# EAGLE board Qwiic_Mux_PCA9846-Panel (EAGLE 9.6.2), part 1 of 7
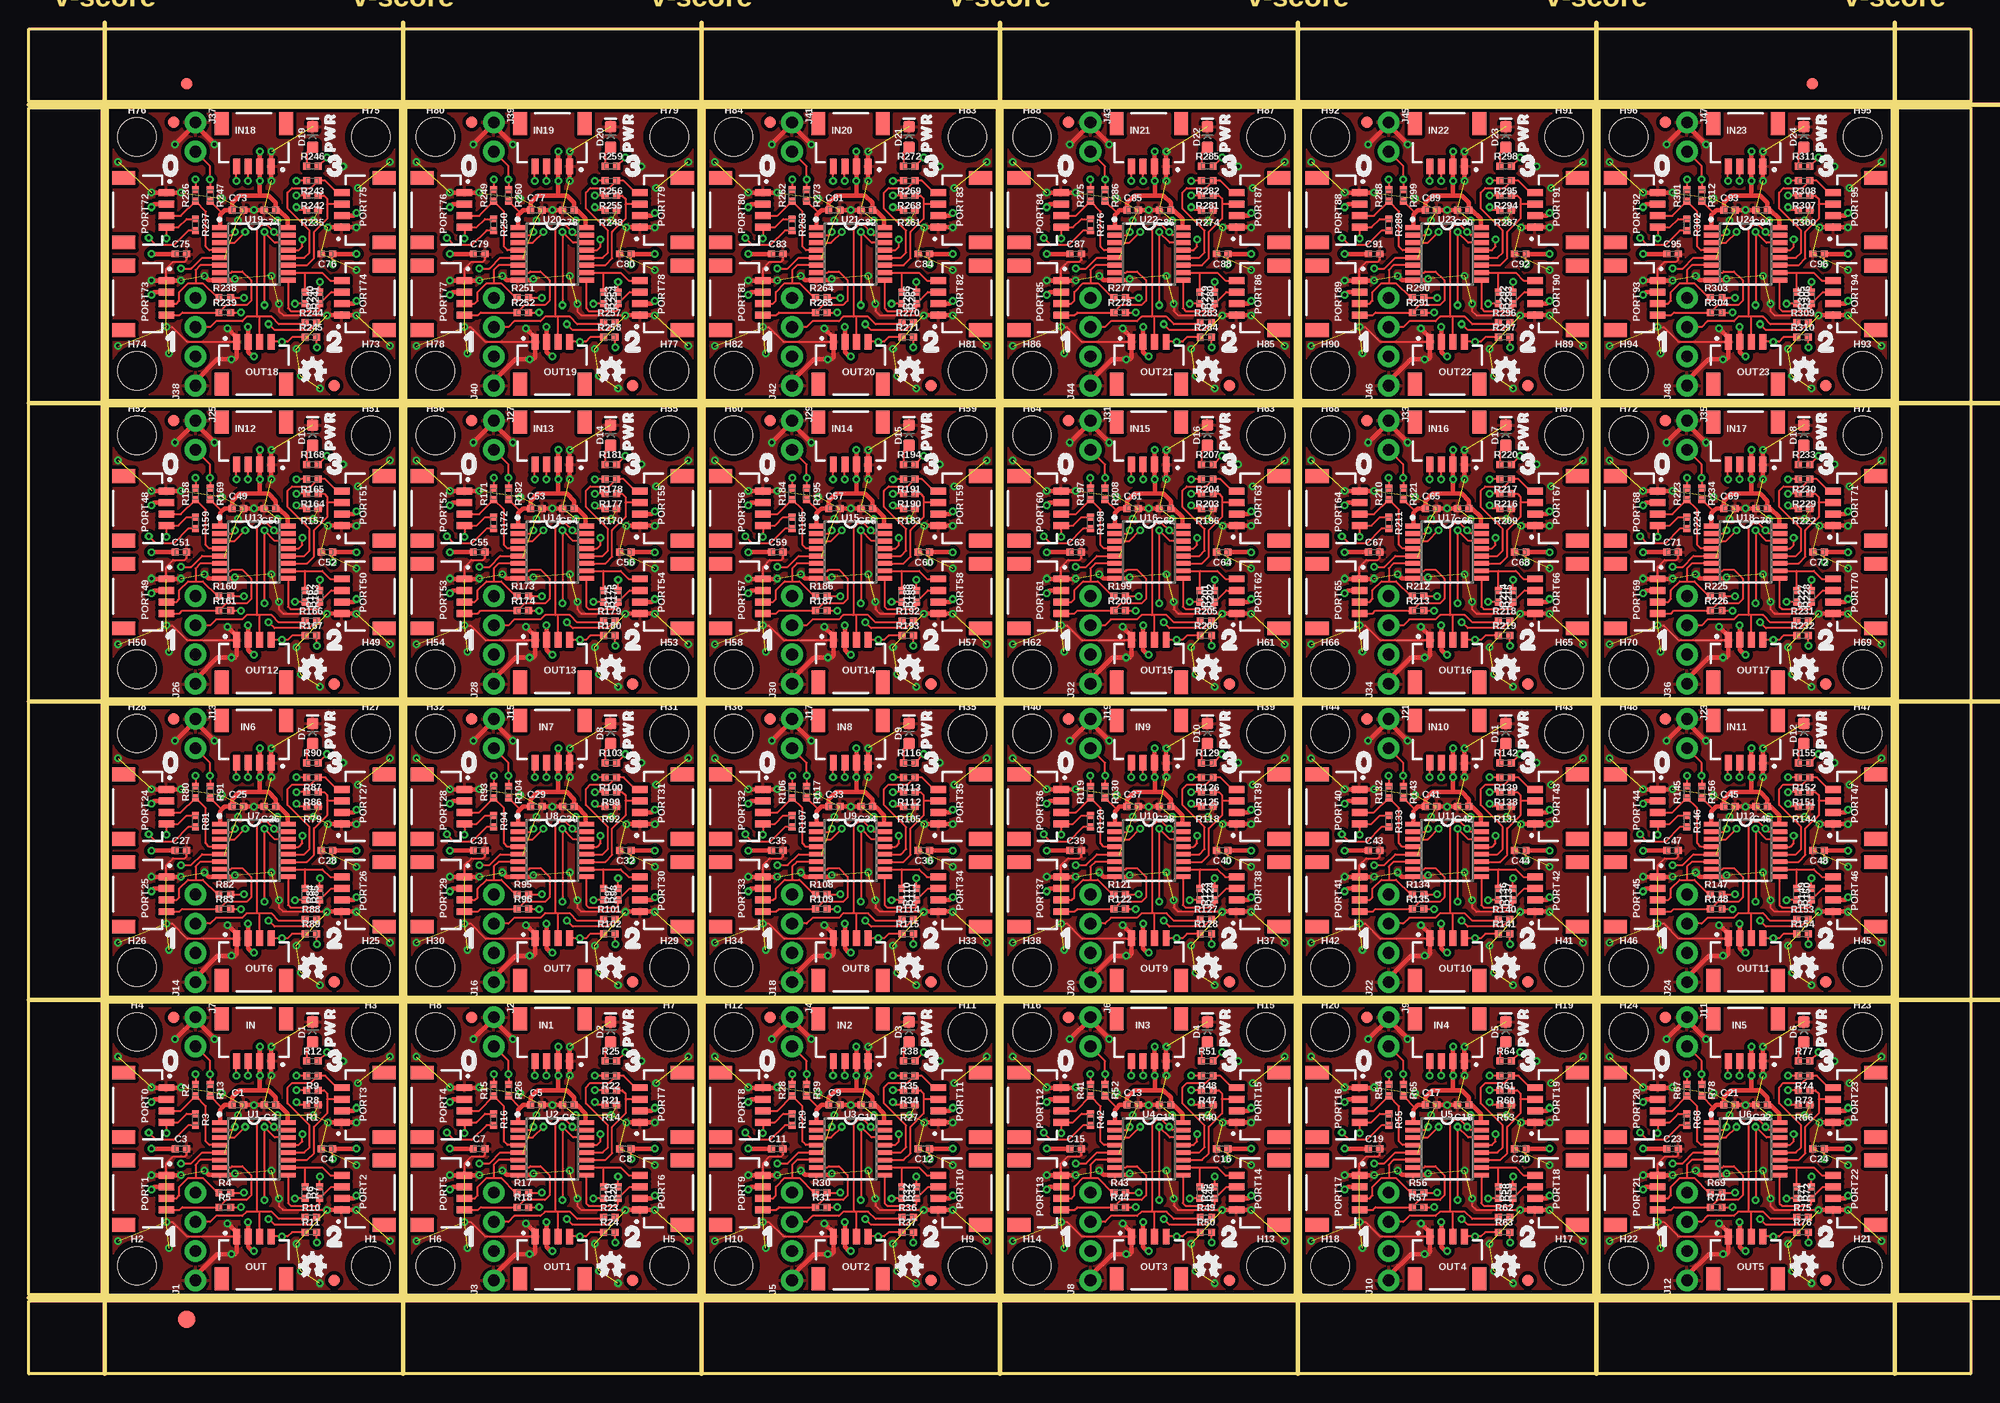
[diagram p0: board, top side]
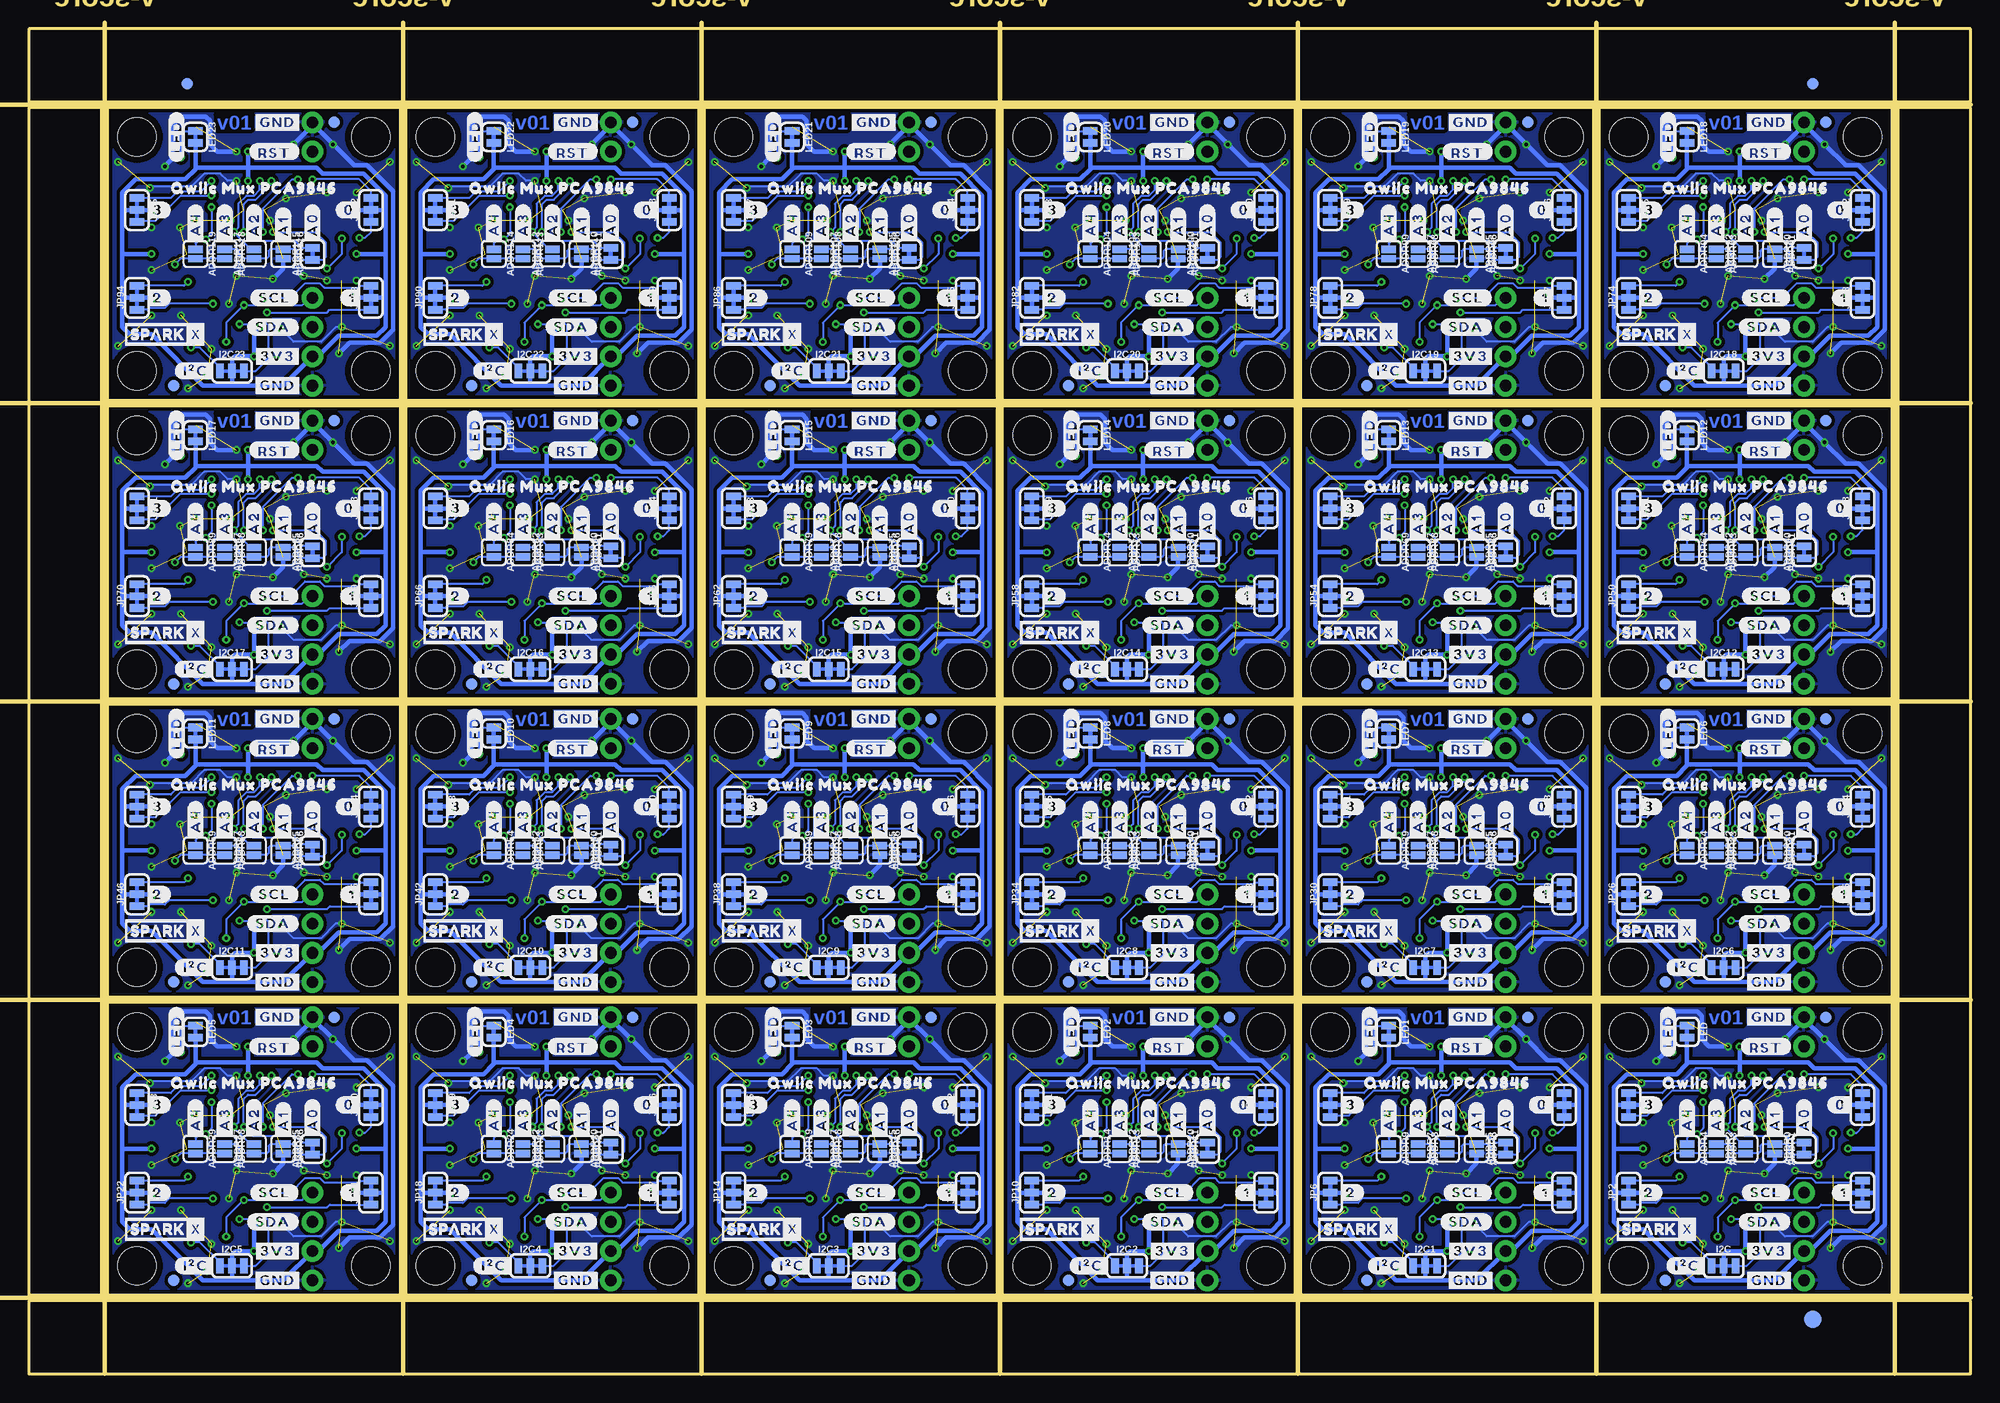
[diagram p1: board, bottom side, seen from below]

Size 168.66 x 116.84 mm. Coordinates in mm from the lower left corner, seen from the top.
Outline: 6.86,6.86 32.26,6.86 32.26,32.26 6.86,32.26 6.86,6.86
Outline: 32.77,6.86 58.17,6.86 58.17,32.26 32.77,32.26 32.77,6.86
Outline: 58.67,6.86 84.07,6.86 84.07,32.26 58.67,32.26 58.67,6.86
Outline: 84.58,6.86 109.98,6.86 109.98,32.26 84.58,32.26 84.58,6.86
Outline: 110.49,6.86 135.89,6.86 135.89,32.26 110.49,32.26 110.49,6.86
Outline: 136.4,6.86 161.8,6.86 161.8,32.26 136.4,32.26 136.4,6.86
Outline: 6.86,32.77 32.26,32.77 32.26,58.17 6.86,58.17 6.86,32.77
Outline: 32.77,32.77 58.17,32.77 58.17,58.17 32.77,58.17 32.77,32.77
Outline: 58.67,32.77 84.07,32.77 84.07,58.17 58.67,58.17 58.67,32.77
Outline: 84.58,32.77 109.98,32.77 109.98,58.17 84.58,58.17 84.58,32.77
Outline: 110.49,32.77 135.89,32.77 135.89,58.17 110.49,58.17 110.49,32.77
Outline: 136.4,32.77 161.8,32.77 161.8,58.17 136.4,58.17 136.4,32.77
Outline: 6.86,58.67 32.26,58.67 32.26,84.07 6.86,84.07 6.86,58.67
Outline: 32.77,58.67 58.17,58.67 58.17,84.07 32.77,84.07 32.77,58.67
Outline: 58.67,58.67 84.07,58.67 84.07,84.07 58.67,84.07 58.67,58.67
Outline: 84.58,58.67 109.98,58.67 109.98,84.07 84.58,84.07 84.58,58.67
Outline: 110.49,58.67 135.89,58.67 135.89,84.07 110.49,84.07 110.49,58.67
Outline: 136.4,58.67 161.8,58.67 161.8,84.07 136.4,84.07 136.4,58.67
Outline: 6.86,84.58 32.26,84.58 32.26,109.98 6.86,109.98 6.86,84.58
Outline: 32.77,84.58 58.17,84.58 58.17,109.98 32.77,109.98 32.77,84.58
Outline: 58.67,84.58 84.07,84.58 84.07,109.98 58.67,109.98 58.67,84.58
Outline: 84.58,84.58 109.98,84.58 109.98,109.98 84.58,109.98 84.58,84.58
Outline: 110.49,84.58 135.89,84.58 135.89,109.98 110.49,109.98 110.49,84.58
Outline: 136.4,84.58 161.8,84.58 161.8,109.98 136.4,109.98 136.4,84.58
Outline: 0,6.35 168.66,6.35 168.66,0 0,0 0,6.35
Outline: 162.31,109.98 168.66,109.98 168.66,6.86 162.31,6.86 162.31,109.98
Outline: 0,116.84 168.66,116.84 168.66,110.49 0,110.49 0,116.84
Outline: 0,109.98 6.35,109.98 6.35,6.86 0,6.86 0,109.98
Copper layers (1*16): Top 0.035mm / dielectric 1.5mm / Bottom 0.035mm
Design rules "Qwiic_Mux_PCA9846": minimum track width 7mil, minimum drill 0.3mm, track to track 7mil, track to pad 7mil, pad to pad 7mil, via to via 7mil, smd to smd 7mil, copper to edge 7mil, drill to drill 7mil, minimum pad ring 7mil, minimum via ring 7mil, stop-mask expansion 3mil, vias tented up to drill 25mil, thermal gap 10mil
Milling: 12 lines

## Footprints (pad centres in the part's own frame; a part is rotated, then mirrored left to right if it is on the bottom)
SMT-JUMPER_2_NC_TRACE_SILK = smd 0.66 x 1.27: 1 -0.521,0; 2 0.521,0
SMT-JUMPER_2_NO_SILK = smd 0.635 x 1.27: 1 -0.406,0; 2 0.406,0
0402-TIGHT = smd 0.6 x 0.6: 1 -0.5,0; 2 0.5,0
LED-0603 = smd 1 x 1: A -0.877,0; C 0.877,0
FIDUCIAL-1X2 = smd 1 x 1: 1 0,0
FIDUCIAL-1.5X3 = smd 1.5 x 1.5: 1 0,0
STAND-OFF = hole 3.302: 0,0
SMT-JUMPER_3_2-NC_TRACE_SILK = smd 0.66 x 1.27: 1 -1.041,0; 2 0,0; 3 1.041,0
JST04_1MM_RA = smd 0.6 x 1.35: 1 -1.5,0; 2 -0.5,0; 3 0.5,0; 4 1.5,0 | smd 1.2 x 2: NC1 2.8,-3.675; NC2 -2.8,-3.675
1X04_NO_SILK = drill 1.016 pad 1.88: 1 0,0; 2 2.54,0; 3 5.08,0; 4 7.62,0
1X02_NO_SILK = drill 1.016 pad 1.88: 1 0,0; 2 2.54,0
SOT403-1 = smd 0.4 x 1.4: 1 -2.275,-2.95; 2 -1.625,-2.95; 3 -0.975,-2.95; 4 -0.325,-2.95; 5 0.325,-2.95; 6 0.975,-2.95; 7 1.625,-2.95; 8 2.275,-2.95; 9 2.275,2.95; 10 1.625,2.95; 11 0.975,2.95; 12 0.325,2.95; 13 -0.325,2.95; 14 -0.975,2.95; 15 -1.625,2.95; 16 -2.275,2.95

## Placement (x,y rotation side)
ADDR0  JUMPER-SMT_2_NC_TRACE_SILK  [SMT-JUMPER_2_NC_TRACE_SILK]  14.48,19.56 90 bottom
ADDR1  JUMPER-SMT_2_NO_SILK  [SMT-JUMPER_2_NO_SILK]  17.02,19.56 270 bottom
ADDR2  JUMPER-SMT_2_NO_SILK  [SMT-JUMPER_2_NO_SILK]  19.56,19.56 90 bottom
ADDR3  JUMPER-SMT_2_NO_SILK  [SMT-JUMPER_2_NO_SILK]  22.1,19.56 270 bottom
ADDR4  JUMPER-SMT_2_NO_SILK  [SMT-JUMPER_2_NO_SILK]  24.64,19.56 270 bottom
ADDR5  JUMPER-SMT_2_NC_TRACE_SILK  [SMT-JUMPER_2_NC_TRACE_SILK]  40.39,19.56 90 bottom
ADDR6  JUMPER-SMT_2_NO_SILK  [SMT-JUMPER_2_NO_SILK]  42.93,19.56 270 bottom
ADDR7  JUMPER-SMT_2_NO_SILK  [SMT-JUMPER_2_NO_SILK]  45.47,19.56 90 bottom
ADDR8  JUMPER-SMT_2_NO_SILK  [SMT-JUMPER_2_NO_SILK]  48.01,19.56 270 bottom
ADDR9  JUMPER-SMT_2_NO_SILK  [SMT-JUMPER_2_NO_SILK]  50.55,19.56 270 bottom
ADDR10  JUMPER-SMT_2_NC_TRACE_SILK  [SMT-JUMPER_2_NC_TRACE_SILK]  66.29,19.56 90 bottom
ADDR11  JUMPER-SMT_2_NO_SILK  [SMT-JUMPER_2_NO_SILK]  68.83,19.56 270 bottom
ADDR12  JUMPER-SMT_2_NO_SILK  [SMT-JUMPER_2_NO_SILK]  71.37,19.56 90 bottom
ADDR13  JUMPER-SMT_2_NO_SILK  [SMT-JUMPER_2_NO_SILK]  73.91,19.56 270 bottom
ADDR14  JUMPER-SMT_2_NO_SILK  [SMT-JUMPER_2_NO_SILK]  76.45,19.56 270 bottom
ADDR15  JUMPER-SMT_2_NC_TRACE_SILK  [SMT-JUMPER_2_NC_TRACE_SILK]  92.2,19.56 90 bottom
ADDR16  JUMPER-SMT_2_NO_SILK  [SMT-JUMPER_2_NO_SILK]  94.74,19.56 270 bottom
ADDR17  JUMPER-SMT_2_NO_SILK  [SMT-JUMPER_2_NO_SILK]  97.28,19.56 90 bottom
ADDR18  JUMPER-SMT_2_NO_SILK  [SMT-JUMPER_2_NO_SILK]  99.82,19.56 270 bottom
ADDR19  JUMPER-SMT_2_NO_SILK  [SMT-JUMPER_2_NO_SILK]  102.36,19.56 270 bottom
ADDR20  JUMPER-SMT_2_NC_TRACE_SILK  [SMT-JUMPER_2_NC_TRACE_SILK]  118.11,19.56 90 bottom
ADDR21  JUMPER-SMT_2_NO_SILK  [SMT-JUMPER_2_NO_SILK]  120.65,19.56 270 bottom
ADDR22  JUMPER-SMT_2_NO_SILK  [SMT-JUMPER_2_NO_SILK]  123.19,19.56 90 bottom
ADDR23  JUMPER-SMT_2_NO_SILK  [SMT-JUMPER_2_NO_SILK]  125.73,19.56 270 bottom
ADDR24  JUMPER-SMT_2_NO_SILK  [SMT-JUMPER_2_NO_SILK]  128.27,19.56 270 bottom
ADDR25  JUMPER-SMT_2_NC_TRACE_SILK  [SMT-JUMPER_2_NC_TRACE_SILK]  144.02,19.56 90 bottom
ADDR26  JUMPER-SMT_2_NO_SILK  [SMT-JUMPER_2_NO_SILK]  146.56,19.56 270 bottom
ADDR27  JUMPER-SMT_2_NO_SILK  [SMT-JUMPER_2_NO_SILK]  149.1,19.56 90 bottom
ADDR28  JUMPER-SMT_2_NO_SILK  [SMT-JUMPER_2_NO_SILK]  151.64,19.56 270 bottom
ADDR29  JUMPER-SMT_2_NO_SILK  [SMT-JUMPER_2_NO_SILK]  154.18,19.56 270 bottom
ADDR30  JUMPER-SMT_2_NC_TRACE_SILK  [SMT-JUMPER_2_NC_TRACE_SILK]  14.48,45.47 90 bottom
ADDR31  JUMPER-SMT_2_NO_SILK  [SMT-JUMPER_2_NO_SILK]  17.02,45.47 270 bottom
ADDR32  JUMPER-SMT_2_NO_SILK  [SMT-JUMPER_2_NO_SILK]  19.56,45.47 90 bottom
ADDR33  JUMPER-SMT_2_NO_SILK  [SMT-JUMPER_2_NO_SILK]  22.1,45.47 270 bottom
ADDR34  JUMPER-SMT_2_NO_SILK  [SMT-JUMPER_2_NO_SILK]  24.64,45.47 270 bottom
ADDR35  JUMPER-SMT_2_NC_TRACE_SILK  [SMT-JUMPER_2_NC_TRACE_SILK]  40.39,45.47 90 bottom
ADDR36  JUMPER-SMT_2_NO_SILK  [SMT-JUMPER_2_NO_SILK]  42.93,45.47 270 bottom
ADDR37  JUMPER-SMT_2_NO_SILK  [SMT-JUMPER_2_NO_SILK]  45.47,45.47 90 bottom
ADDR38  JUMPER-SMT_2_NO_SILK  [SMT-JUMPER_2_NO_SILK]  48.01,45.47 270 bottom
ADDR39  JUMPER-SMT_2_NO_SILK  [SMT-JUMPER_2_NO_SILK]  50.55,45.47 270 bottom
ADDR40  JUMPER-SMT_2_NC_TRACE_SILK  [SMT-JUMPER_2_NC_TRACE_SILK]  66.29,45.47 90 bottom
ADDR41  JUMPER-SMT_2_NO_SILK  [SMT-JUMPER_2_NO_SILK]  68.83,45.47 270 bottom
ADDR42  JUMPER-SMT_2_NO_SILK  [SMT-JUMPER_2_NO_SILK]  71.37,45.47 90 bottom
ADDR43  JUMPER-SMT_2_NO_SILK  [SMT-JUMPER_2_NO_SILK]  73.91,45.47 270 bottom
ADDR44  JUMPER-SMT_2_NO_SILK  [SMT-JUMPER_2_NO_SILK]  76.45,45.47 270 bottom
ADDR45  JUMPER-SMT_2_NC_TRACE_SILK  [SMT-JUMPER_2_NC_TRACE_SILK]  92.2,45.47 90 bottom
ADDR46  JUMPER-SMT_2_NO_SILK  [SMT-JUMPER_2_NO_SILK]  94.74,45.47 270 bottom
ADDR47  JUMPER-SMT_2_NO_SILK  [SMT-JUMPER_2_NO_SILK]  97.28,45.47 90 bottom
ADDR48  JUMPER-SMT_2_NO_SILK  [SMT-JUMPER_2_NO_SILK]  99.82,45.47 270 bottom
ADDR49  JUMPER-SMT_2_NO_SILK  [SMT-JUMPER_2_NO_SILK]  102.36,45.47 270 bottom
ADDR50  JUMPER-SMT_2_NC_TRACE_SILK  [SMT-JUMPER_2_NC_TRACE_SILK]  118.11,45.47 90 bottom
ADDR51  JUMPER-SMT_2_NO_SILK  [SMT-JUMPER_2_NO_SILK]  120.65,45.47 270 bottom
ADDR52  JUMPER-SMT_2_NO_SILK  [SMT-JUMPER_2_NO_SILK]  123.19,45.47 90 bottom
ADDR53  JUMPER-SMT_2_NO_SILK  [SMT-JUMPER_2_NO_SILK]  125.73,45.47 270 bottom
ADDR54  JUMPER-SMT_2_NO_SILK  [SMT-JUMPER_2_NO_SILK]  128.27,45.47 270 bottom
ADDR55  JUMPER-SMT_2_NC_TRACE_SILK  [SMT-JUMPER_2_NC_TRACE_SILK]  144.02,45.47 90 bottom
ADDR56  JUMPER-SMT_2_NO_SILK  [SMT-JUMPER_2_NO_SILK]  146.56,45.47 270 bottom
ADDR57  JUMPER-SMT_2_NO_SILK  [SMT-JUMPER_2_NO_SILK]  149.1,45.47 90 bottom
ADDR58  JUMPER-SMT_2_NO_SILK  [SMT-JUMPER_2_NO_SILK]  151.64,45.47 270 bottom
ADDR59  JUMPER-SMT_2_NO_SILK  [SMT-JUMPER_2_NO_SILK]  154.18,45.47 270 bottom
ADDR60  JUMPER-SMT_2_NC_TRACE_SILK  [SMT-JUMPER_2_NC_TRACE_SILK]  14.48,71.37 90 bottom
ADDR61  JUMPER-SMT_2_NO_SILK  [SMT-JUMPER_2_NO_SILK]  17.02,71.37 270 bottom
ADDR62  JUMPER-SMT_2_NO_SILK  [SMT-JUMPER_2_NO_SILK]  19.56,71.37 90 bottom
ADDR63  JUMPER-SMT_2_NO_SILK  [SMT-JUMPER_2_NO_SILK]  22.1,71.37 270 bottom
ADDR64  JUMPER-SMT_2_NO_SILK  [SMT-JUMPER_2_NO_SILK]  24.64,71.37 270 bottom
ADDR65  JUMPER-SMT_2_NC_TRACE_SILK  [SMT-JUMPER_2_NC_TRACE_SILK]  40.39,71.37 90 bottom
ADDR66  JUMPER-SMT_2_NO_SILK  [SMT-JUMPER_2_NO_SILK]  42.93,71.37 270 bottom
ADDR67  JUMPER-SMT_2_NO_SILK  [SMT-JUMPER_2_NO_SILK]  45.47,71.37 90 bottom
ADDR68  JUMPER-SMT_2_NO_SILK  [SMT-JUMPER_2_NO_SILK]  48.01,71.37 270 bottom
ADDR69  JUMPER-SMT_2_NO_SILK  [SMT-JUMPER_2_NO_SILK]  50.55,71.37 270 bottom
ADDR70  JUMPER-SMT_2_NC_TRACE_SILK  [SMT-JUMPER_2_NC_TRACE_SILK]  66.29,71.37 90 bottom
ADDR71  JUMPER-SMT_2_NO_SILK  [SMT-JUMPER_2_NO_SILK]  68.83,71.37 270 bottom
ADDR72  JUMPER-SMT_2_NO_SILK  [SMT-JUMPER_2_NO_SILK]  71.37,71.37 90 bottom
ADDR73  JUMPER-SMT_2_NO_SILK  [SMT-JUMPER_2_NO_SILK]  73.91,71.37 270 bottom
ADDR74  JUMPER-SMT_2_NO_SILK  [SMT-JUMPER_2_NO_SILK]  76.45,71.37 270 bottom
ADDR75  JUMPER-SMT_2_NC_TRACE_SILK  [SMT-JUMPER_2_NC_TRACE_SILK]  92.2,71.37 90 bottom
ADDR76  JUMPER-SMT_2_NO_SILK  [SMT-JUMPER_2_NO_SILK]  94.74,71.37 270 bottom
ADDR77  JUMPER-SMT_2_NO_SILK  [SMT-JUMPER_2_NO_SILK]  97.28,71.37 90 bottom
ADDR78  JUMPER-SMT_2_NO_SILK  [SMT-JUMPER_2_NO_SILK]  99.82,71.37 270 bottom
ADDR79  JUMPER-SMT_2_NO_SILK  [SMT-JUMPER_2_NO_SILK]  102.36,71.37 270 bottom
ADDR80  JUMPER-SMT_2_NC_TRACE_SILK  [SMT-JUMPER_2_NC_TRACE_SILK]  118.11,71.37 90 bottom
ADDR81  JUMPER-SMT_2_NO_SILK  [SMT-JUMPER_2_NO_SILK]  120.65,71.37 270 bottom
ADDR82  JUMPER-SMT_2_NO_SILK  [SMT-JUMPER_2_NO_SILK]  123.19,71.37 90 bottom
ADDR83  JUMPER-SMT_2_NO_SILK  [SMT-JUMPER_2_NO_SILK]  125.73,71.37 270 bottom
ADDR84  JUMPER-SMT_2_NO_SILK  [SMT-JUMPER_2_NO_SILK]  128.27,71.37 270 bottom
ADDR85  JUMPER-SMT_2_NC_TRACE_SILK  [SMT-JUMPER_2_NC_TRACE_SILK]  144.02,71.37 90 bottom
ADDR86  JUMPER-SMT_2_NO_SILK  [SMT-JUMPER_2_NO_SILK]  146.56,71.37 270 bottom
ADDR87  JUMPER-SMT_2_NO_SILK  [SMT-JUMPER_2_NO_SILK]  149.1,71.37 90 bottom
ADDR88  JUMPER-SMT_2_NO_SILK  [SMT-JUMPER_2_NO_SILK]  151.64,71.37 270 bottom
ADDR89  JUMPER-SMT_2_NO_SILK  [SMT-JUMPER_2_NO_SILK]  154.18,71.37 270 bottom
ADDR90  JUMPER-SMT_2_NC_TRACE_SILK  [SMT-JUMPER_2_NC_TRACE_SILK]  14.48,97.28 90 bottom
ADDR91  JUMPER-SMT_2_NO_SILK  [SMT-JUMPER_2_NO_SILK]  17.02,97.28 270 bottom
ADDR92  JUMPER-SMT_2_NO_SILK  [SMT-JUMPER_2_NO_SILK]  19.56,97.28 90 bottom
ADDR93  JUMPER-SMT_2_NO_SILK  [SMT-JUMPER_2_NO_SILK]  22.1,97.28 270 bottom
ADDR94  JUMPER-SMT_2_NO_SILK  [SMT-JUMPER_2_NO_SILK]  24.64,97.28 270 bottom
ADDR95  JUMPER-SMT_2_NC_TRACE_SILK  [SMT-JUMPER_2_NC_TRACE_SILK]  40.39,97.28 90 bottom
ADDR96  JUMPER-SMT_2_NO_SILK  [SMT-JUMPER_2_NO_SILK]  42.93,97.28 270 bottom
ADDR97  JUMPER-SMT_2_NO_SILK  [SMT-JUMPER_2_NO_SILK]  45.47,97.28 90 bottom
ADDR98  JUMPER-SMT_2_NO_SILK  [SMT-JUMPER_2_NO_SILK]  48.01,97.28 270 bottom
ADDR99  JUMPER-SMT_2_NO_SILK  [SMT-JUMPER_2_NO_SILK]  50.55,97.28 270 bottom
ADDR100  JUMPER-SMT_2_NC_TRACE_SILK  [SMT-JUMPER_2_NC_TRACE_SILK]  66.29,97.28 90 bottom
ADDR101  JUMPER-SMT_2_NO_SILK  [SMT-JUMPER_2_NO_SILK]  68.83,97.28 270 bottom
ADDR102  JUMPER-SMT_2_NO_SILK  [SMT-JUMPER_2_NO_SILK]  71.37,97.28 90 bottom
ADDR103  JUMPER-SMT_2_NO_SILK  [SMT-JUMPER_2_NO_SILK]  73.91,97.28 270 bottom
ADDR104  JUMPER-SMT_2_NO_SILK  [SMT-JUMPER_2_NO_SILK]  76.45,97.28 270 bottom
ADDR105  JUMPER-SMT_2_NC_TRACE_SILK  [SMT-JUMPER_2_NC_TRACE_SILK]  92.2,97.28 90 bottom
ADDR106  JUMPER-SMT_2_NO_SILK  [SMT-JUMPER_2_NO_SILK]  94.74,97.28 270 bottom
ADDR107  JUMPER-SMT_2_NO_SILK  [SMT-JUMPER_2_NO_SILK]  97.28,97.28 90 bottom
ADDR108  JUMPER-SMT_2_NO_SILK  [SMT-JUMPER_2_NO_SILK]  99.82,97.28 270 bottom
ADDR109  JUMPER-SMT_2_NO_SILK  [SMT-JUMPER_2_NO_SILK]  102.36,97.28 270 bottom
ADDR110  JUMPER-SMT_2_NC_TRACE_SILK  [SMT-JUMPER_2_NC_TRACE_SILK]  118.11,97.28 90 bottom
ADDR111  JUMPER-SMT_2_NO_SILK  [SMT-JUMPER_2_NO_SILK]  120.65,97.28 270 bottom
ADDR112  JUMPER-SMT_2_NO_SILK  [SMT-JUMPER_2_NO_SILK]  123.19,97.28 90 bottom
ADDR113  JUMPER-SMT_2_NO_SILK  [SMT-JUMPER_2_NO_SILK]  125.73,97.28 270 bottom
ADDR114  JUMPER-SMT_2_NO_SILK  [SMT-JUMPER_2_NO_SILK]  128.27,97.28 270 bottom
ADDR115  JUMPER-SMT_2_NC_TRACE_SILK  [SMT-JUMPER_2_NC_TRACE_SILK]  144.02,97.28 90 bottom
ADDR116  JUMPER-SMT_2_NO_SILK  [SMT-JUMPER_2_NO_SILK]  146.56,97.28 270 bottom
ADDR117  JUMPER-SMT_2_NO_SILK  [SMT-JUMPER_2_NO_SILK]  149.1,97.28 90 bottom
ADDR118  JUMPER-SMT_2_NO_SILK  [SMT-JUMPER_2_NO_SILK]  151.64,97.28 270 bottom
ADDR119  JUMPER-SMT_2_NO_SILK  [SMT-JUMPER_2_NO_SILK]  154.18,97.28 270 bottom
C1  2.2uF  [0402-TIGHT]  18.16,23.37 0 top
C2  0.1uF  [0402-TIGHT]  20.95,23.37 180 top
C3  2.2uF  [0402-TIGHT]  13.21,19.56 0 top
C4  2.2uF  [0402-TIGHT]  25.91,19.56 180 top
C5  2.2uF  [0402-TIGHT]  44.07,23.37 0 top
C6  0.1uF  [0402-TIGHT]  46.86,23.37 180 top
C7  2.2uF  [0402-TIGHT]  39.12,19.56 0 top
C8  2.2uF  [0402-TIGHT]  51.82,19.56 180 top
C9  2.2uF  [0402-TIGHT]  69.98,23.37 0 top
C10  0.1uF  [0402-TIGHT]  72.77,23.37 180 top
C11  2.2uF  [0402-TIGHT]  65.02,19.56 0 top
C12  2.2uF  [0402-TIGHT]  77.72,19.56 180 top
C13  2.2uF  [0402-TIGHT]  95.89,23.37 0 top
C14  0.1uF  [0402-TIGHT]  98.68,23.37 180 top
C15  2.2uF  [0402-TIGHT]  90.93,19.56 0 top
C16  2.2uF  [0402-TIGHT]  103.63,19.56 180 top
C17  2.2uF  [0402-TIGHT]  121.79,23.37 0 top
C18  0.1uF  [0402-TIGHT]  124.59,23.37 180 top
C19  2.2uF  [0402-TIGHT]  116.84,19.56 0 top
C20  2.2uF  [0402-TIGHT]  129.54,19.56 180 top
C21  2.2uF  [0402-TIGHT]  147.7,23.37 0 top
C22  0.1uF  [0402-TIGHT]  150.5,23.37 180 top
C23  2.2uF  [0402-TIGHT]  142.75,19.56 0 top
C24  2.2uF  [0402-TIGHT]  155.45,19.56 180 top
C25  2.2uF  [0402-TIGHT]  18.16,49.28 0 top
C26  0.1uF  [0402-TIGHT]  20.95,49.28 180 top
C27  2.2uF  [0402-TIGHT]  13.21,45.47 0 top
C28  2.2uF  [0402-TIGHT]  25.91,45.47 180 top
C29  2.2uF  [0402-TIGHT]  44.07,49.28 0 top
C30  0.1uF  [0402-TIGHT]  46.86,49.28 180 top
C31  2.2uF  [0402-TIGHT]  39.12,45.47 0 top
C32  2.2uF  [0402-TIGHT]  51.82,45.47 180 top
C33  2.2uF  [0402-TIGHT]  69.98,49.28 0 top
C34  0.1uF  [0402-TIGHT]  72.77,49.28 180 top
C35  2.2uF  [0402-TIGHT]  65.02,45.47 0 top
C36  2.2uF  [0402-TIGHT]  77.72,45.47 180 top
C37  2.2uF  [0402-TIGHT]  95.89,49.28 0 top
C38  0.1uF  [0402-TIGHT]  98.68,49.28 180 top
C39  2.2uF  [0402-TIGHT]  90.93,45.47 0 top
C40  2.2uF  [0402-TIGHT]  103.63,45.47 180 top
C41  2.2uF  [0402-TIGHT]  121.79,49.28 0 top
C42  0.1uF  [0402-TIGHT]  124.59,49.28 180 top
C43  2.2uF  [0402-TIGHT]  116.84,45.47 0 top
C44  2.2uF  [0402-TIGHT]  129.54,45.47 180 top
C45  2.2uF  [0402-TIGHT]  147.7,49.28 0 top
C46  0.1uF  [0402-TIGHT]  150.5,49.28 180 top
C47  2.2uF  [0402-TIGHT]  142.75,45.47 0 top
C48  2.2uF  [0402-TIGHT]  155.45,45.47 180 top
C49  2.2uF  [0402-TIGHT]  18.16,75.18 0 top
C50  0.1uF  [0402-TIGHT]  20.95,75.18 180 top
C51  2.2uF  [0402-TIGHT]  13.21,71.37 0 top
C52  2.2uF  [0402-TIGHT]  25.91,71.37 180 top
C53  2.2uF  [0402-TIGHT]  44.07,75.18 0 top
C54  0.1uF  [0402-TIGHT]  46.86,75.18 180 top
C55  2.2uF  [0402-TIGHT]  39.12,71.37 0 top
C56  2.2uF  [0402-TIGHT]  51.82,71.37 180 top
C57  2.2uF  [0402-TIGHT]  69.98,75.18 0 top
C58  0.1uF  [0402-TIGHT]  72.77,75.18 180 top
C59  2.2uF  [0402-TIGHT]  65.02,71.37 0 top
C60  2.2uF  [0402-TIGHT]  77.72,71.37 180 top
C61  2.2uF  [0402-TIGHT]  95.89,75.18 0 top
C62  0.1uF  [0402-TIGHT]  98.68,75.18 180 top
C63  2.2uF  [0402-TIGHT]  90.93,71.37 0 top
C64  2.2uF  [0402-TIGHT]  103.63,71.37 180 top
C65  2.2uF  [0402-TIGHT]  121.79,75.18 0 top
C66  0.1uF  [0402-TIGHT]  124.59,75.18 180 top
C67  2.2uF  [0402-TIGHT]  116.84,71.37 0 top
C68  2.2uF  [0402-TIGHT]  129.54,71.37 180 top
C69  2.2uF  [0402-TIGHT]  147.7,75.18 0 top
C70  0.1uF  [0402-TIGHT]  150.5,75.18 180 top
C71  2.2uF  [0402-TIGHT]  142.75,71.37 0 top
C72  2.2uF  [0402-TIGHT]  155.45,71.37 180 top
C73  2.2uF  [0402-TIGHT]  18.16,101.09 0 top
C74  0.1uF  [0402-TIGHT]  20.95,101.09 180 top
C75  2.2uF  [0402-TIGHT]  13.21,97.28 0 top
C76  2.2uF  [0402-TIGHT]  25.91,97.28 180 top
C77  2.2uF  [0402-TIGHT]  44.07,101.09 0 top
C78  0.1uF  [0402-TIGHT]  46.86,101.09 180 top
C79  2.2uF  [0402-TIGHT]  39.12,97.28 0 top
C80  2.2uF  [0402-TIGHT]  51.82,97.28 180 top
C81  2.2uF  [0402-TIGHT]  69.98,101.09 0 top
C82  0.1uF  [0402-TIGHT]  72.77,101.09 180 top
C83  2.2uF  [0402-TIGHT]  65.02,97.28 0 top
C84  2.2uF  [0402-TIGHT]  77.72,97.28 180 top
C85  2.2uF  [0402-TIGHT]  95.89,101.09 0 top
C86  0.1uF  [0402-TIGHT]  98.68,101.09 180 top
C87  2.2uF  [0402-TIGHT]  90.93,97.28 0 top
C88  2.2uF  [0402-TIGHT]  103.63,97.28 180 top
C89  2.2uF  [0402-TIGHT]  121.79,101.09 0 top
C90  0.1uF  [0402-TIGHT]  124.59,101.09 180 top
C91  2.2uF  [0402-TIGHT]  116.84,97.28 0 top
C92  2.2uF  [0402-TIGHT]  129.54,97.28 180 top
C93  2.2uF  [0402-TIGHT]  147.7,101.09 0 top
C94  0.1uF  [0402-TIGHT]  150.5,101.09 180 top
C95  2.2uF  [0402-TIGHT]  142.75,97.28 0 top
C96  2.2uF  [0402-TIGHT]  155.45,97.28 180 top
D1  RED  [LED-0603]  24.64,29.72 90 top
D2  RED  [LED-0603]  50.55,29.72 90 top
D3  RED  [LED-0603]  76.45,29.72 90 top
D4  RED  [LED-0603]  102.36,29.72 90 top
D5  RED  [LED-0603]  128.27,29.72 90 top
D6  RED  [LED-0603]  154.18,29.72 90 top
D7  RED  [LED-0603]  24.64,55.63 90 top
D8  RED  [LED-0603]  50.55,55.63 90 top
D9  RED  [LED-0603]  76.45,55.63 90 top
D10  RED  [LED-0603]  102.36,55.63 90 top
D11  RED  [LED-0603]  128.27,55.63 90 top
D12  RED  [LED-0603]  154.18,55.63 90 top
D13  RED  [LED-0603]  24.64,81.53 90 top
D14  RED  [LED-0603]  50.55,81.53 90 top
D15  RED  [LED-0603]  76.45,81.53 90 top
D16  RED  [LED-0603]  102.36,81.53 90 top
D17  RED  [LED-0603]  128.27,81.53 90 top
D18  RED  [LED-0603]  154.18,81.53 90 top
D19  RED  [LED-0603]  24.64,107.44 90 top
D20  RED  [LED-0603]  50.55,107.44 90 top
D21  RED  [LED-0603]  76.45,107.44 90 top
D22  RED  [LED-0603]  102.36,107.44 90 top
D23  RED  [LED-0603]  128.27,107.44 90 top
D24  RED  [LED-0603]  154.18,107.44 90 top
E$1  [FIDUCIAL-1X2]  13.72,112.08 0 top
E$2  [FIDUCIAL-1X2]  13.72,112.08 0 bottom
E$3  [FIDUCIAL-1X2]  154.88,112.08 0 top
E$4  [FIDUCIAL-1X2]  154.88,112.08 0 bottom
E$5  [FIDUCIAL-1.5X3]  13.72,4.76 0 top
E$6  [FIDUCIAL-1.5X3]  13.72,4.76 0 bottom
FD1  FIDUCIAL1X2  [FIDUCIAL-1X2]  12.57,30.99 0 top
FD2  FIDUCIAL1X2  [FIDUCIAL-1X2]  26.54,8.13 0 top
FD3  FIDUCIAL1X2  [FIDUCIAL-1X2]  12.57,30.99 0 bottom
FD4  FIDUCIAL1X2  [FIDUCIAL-1X2]  26.54,8.13 0 bottom
FD5  FIDUCIAL1X2  [FIDUCIAL-1X2]  38.48,30.99 0 top
FD6  FIDUCIAL1X2  [FIDUCIAL-1X2]  52.45,8.13 0 top
FD7  FIDUCIAL1X2  [FIDUCIAL-1X2]  38.48,30.99 0 bottom
FD8  FIDUCIAL1X2  [FIDUCIAL-1X2]  52.45,8.13 0 bottom
FD9  FIDUCIAL1X2  [FIDUCIAL-1X2]  64.39,30.99 0 top
FD10  FIDUCIAL1X2  [FIDUCIAL-1X2]  78.36,8.13 0 top
FD11  FIDUCIAL1X2  [FIDUCIAL-1X2]  64.39,30.99 0 bottom
FD12  FIDUCIAL1X2  [FIDUCIAL-1X2]  78.36,8.13 0 bottom
FD13  FIDUCIAL1X2  [FIDUCIAL-1X2]  90.3,30.99 0 top
FD14  FIDUCIAL1X2  [FIDUCIAL-1X2]  104.27,8.13 0 top
FD15  FIDUCIAL1X2  [FIDUCIAL-1X2]  90.3,30.99 0 bottom
FD16  FIDUCIAL1X2  [FIDUCIAL-1X2]  104.27,8.13 0 bottom
FD17  FIDUCIAL1X2  [FIDUCIAL-1X2]  116.2,30.99 0 top
FD18  FIDUCIAL1X2  [FIDUCIAL-1X2]  130.17,8.13 0 top
FD19  FIDUCIAL1X2  [FIDUCIAL-1X2]  116.2,30.99 0 bottom
FD20  FIDUCIAL1X2  [FIDUCIAL-1X2]  130.17,8.13 0 bottom
FD21  FIDUCIAL1X2  [FIDUCIAL-1X2]  142.11,30.99 0 top
FD22  FIDUCIAL1X2  [FIDUCIAL-1X2]  156.08,8.13 0 top
FD23  FIDUCIAL1X2  [FIDUCIAL-1X2]  142.11,30.99 0 bottom
FD24  FIDUCIAL1X2  [FIDUCIAL-1X2]  156.08,8.13 0 bottom
FD25  FIDUCIAL1X2  [FIDUCIAL-1X2]  12.57,56.9 0 top
FD26  FIDUCIAL1X2  [FIDUCIAL-1X2]  26.54,34.04 0 top
FD27  FIDUCIAL1X2  [FIDUCIAL-1X2]  12.57,56.9 0 bottom
FD28  FIDUCIAL1X2  [FIDUCIAL-1X2]  26.54,34.04 0 bottom
FD29  FIDUCIAL1X2  [FIDUCIAL-1X2]  38.48,56.9 0 top
FD30  FIDUCIAL1X2  [FIDUCIAL-1X2]  52.45,34.04 0 top
FD31  FIDUCIAL1X2  [FIDUCIAL-1X2]  38.48,56.9 0 bottom
FD32  FIDUCIAL1X2  [FIDUCIAL-1X2]  52.45,34.04 0 bottom
FD33  FIDUCIAL1X2  [FIDUCIAL-1X2]  64.39,56.9 0 top
FD34  FIDUCIAL1X2  [FIDUCIAL-1X2]  78.36,34.04 0 top
FD35  FIDUCIAL1X2  [FIDUCIAL-1X2]  64.39,56.9 0 bottom
FD36  FIDUCIAL1X2  [FIDUCIAL-1X2]  78.36,34.04 0 bottom
FD37  FIDUCIAL1X2  [FIDUCIAL-1X2]  90.3,56.9 0 top
FD38  FIDUCIAL1X2  [FIDUCIAL-1X2]  104.27,34.04 0 top
FD39  FIDUCIAL1X2  [FIDUCIAL-1X2]  90.3,56.9 0 bottom
FD40  FIDUCIAL1X2  [FIDUCIAL-1X2]  104.27,34.04 0 bottom
FD41  FIDUCIAL1X2  [FIDUCIAL-1X2]  116.2,56.9 0 top
FD42  FIDUCIAL1X2  [FIDUCIAL-1X2]  130.17,34.04 0 top
FD43  FIDUCIAL1X2  [FIDUCIAL-1X2]  116.2,56.9 0 bottom
FD44  FIDUCIAL1X2  [FIDUCIAL-1X2]  130.17,34.04 0 bottom
FD45  FIDUCIAL1X2  [FIDUCIAL-1X2]  142.11,56.9 0 top
FD46  FIDUCIAL1X2  [FIDUCIAL-1X2]  156.08,34.04 0 top
FD47  FIDUCIAL1X2  [FIDUCIAL-1X2]  142.11,56.9 0 bottom
FD48  FIDUCIAL1X2  [FIDUCIAL-1X2]  156.08,34.04 0 bottom
FD49  FIDUCIAL1X2  [FIDUCIAL-1X2]  12.57,82.8 0 top
FD50  FIDUCIAL1X2  [FIDUCIAL-1X2]  26.54,59.94 0 top
FD51  FIDUCIAL1X2  [FIDUCIAL-1X2]  12.57,82.8 0 bottom
FD52  FIDUCIAL1X2  [FIDUCIAL-1X2]  26.54,59.94 0 bottom
FD53  FIDUCIAL1X2  [FIDUCIAL-1X2]  38.48,82.8 0 top
FD54  FIDUCIAL1X2  [FIDUCIAL-1X2]  52.45,59.94 0 top
FD55  FIDUCIAL1X2  [FIDUCIAL-1X2]  38.48,82.8 0 bottom
FD56  FIDUCIAL1X2  [FIDUCIAL-1X2]  52.45,59.94 0 bottom
FD57  FIDUCIAL1X2  [FIDUCIAL-1X2]  64.39,82.8 0 top
FD58  FIDUCIAL1X2  [FIDUCIAL-1X2]  78.36,59.94 0 top
FD59  FIDUCIAL1X2  [FIDUCIAL-1X2]  64.39,82.8 0 bottom
FD60  FIDUCIAL1X2  [FIDUCIAL-1X2]  78.36,59.94 0 bottom
FD61  FIDUCIAL1X2  [FIDUCIAL-1X2]  90.3,82.8 0 top
FD62  FIDUCIAL1X2  [FIDUCIAL-1X2]  104.27,59.94 0 top
FD63  FIDUCIAL1X2  [FIDUCIAL-1X2]  90.3,82.8 0 bottom
FD64  FIDUCIAL1X2  [FIDUCIAL-1X2]  104.27,59.94 0 bottom
FD65  FIDUCIAL1X2  [FIDUCIAL-1X2]  116.2,82.8 0 top
FD66  FIDUCIAL1X2  [FIDUCIAL-1X2]  130.17,59.94 0 top
FD67  FIDUCIAL1X2  [FIDUCIAL-1X2]  116.2,82.8 0 bottom
FD68  FIDUCIAL1X2  [FIDUCIAL-1X2]  130.17,59.94 0 bottom
FD69  FIDUCIAL1X2  [FIDUCIAL-1X2]  142.11,82.8 0 top
FD70  FIDUCIAL1X2  [FIDUCIAL-1X2]  156.08,59.94 0 top
FD71  FIDUCIAL1X2  [FIDUCIAL-1X2]  142.11,82.8 0 bottom
FD72  FIDUCIAL1X2  [FIDUCIAL-1X2]  156.08,59.94 0 bottom
FD73  FIDUCIAL1X2  [FIDUCIAL-1X2]  12.57,108.71 0 top
FD74  FIDUCIAL1X2  [FIDUCIAL-1X2]  26.54,85.85 0 top
FD75  FIDUCIAL1X2  [FIDUCIAL-1X2]  12.57,108.71 0 bottom
FD76  FIDUCIAL1X2  [FIDUCIAL-1X2]  26.54,85.85 0 bottom
FD77  FIDUCIAL1X2  [FIDUCIAL-1X2]  38.48,108.71 0 top
FD78  FIDUCIAL1X2  [FIDUCIAL-1X2]  52.45,85.85 0 top
FD79  FIDUCIAL1X2  [FIDUCIAL-1X2]  38.48,108.71 0 bottom
FD80  FIDUCIAL1X2  [FIDUCIAL-1X2]  52.45,85.85 0 bottom
FD81  FIDUCIAL1X2  [FIDUCIAL-1X2]  64.39,108.71 0 top
FD82  FIDUCIAL1X2  [FIDUCIAL-1X2]  78.36,85.85 0 top
FD83  FIDUCIAL1X2  [FIDUCIAL-1X2]  64.39,108.71 0 bottom
FD84  FIDUCIAL1X2  [FIDUCIAL-1X2]  78.36,85.85 0 bottom
FD85  FIDUCIAL1X2  [FIDUCIAL-1X2]  90.3,108.71 0 top
FD86  FIDUCIAL1X2  [FIDUCIAL-1X2]  104.27,85.85 0 top
FD87  FIDUCIAL1X2  [FIDUCIAL-1X2]  90.3,108.71 0 bottom
FD88  FIDUCIAL1X2  [FIDUCIAL-1X2]  104.27,85.85 0 bottom
FD89  FIDUCIAL1X2  [FIDUCIAL-1X2]  116.2,108.71 0 top
FD90  FIDUCIAL1X2  [FIDUCIAL-1X2]  130.17,85.85 0 top
FD91  FIDUCIAL1X2  [FIDUCIAL-1X2]  116.2,108.71 0 bottom
FD92  FIDUCIAL1X2  [FIDUCIAL-1X2]  130.17,85.85 0 bottom
FD93  FIDUCIAL1X2  [FIDUCIAL-1X2]  142.11,108.71 0 top
FD94  FIDUCIAL1X2  [FIDUCIAL-1X2]  156.08,85.85 0 top
FD95  FIDUCIAL1X2  [FIDUCIAL-1X2]  142.11,108.71 0 bottom
FD96  FIDUCIAL1X2  [FIDUCIAL-1X2]  156.08,85.85 0 bottom
H1  STAND-OFF  [STAND-OFF]  29.72,9.4 0 top
H2  STAND-OFF  [STAND-OFF]  9.4,9.4 0 top
H3  STAND-OFF  [STAND-OFF]  29.72,29.72 0 top
H4  STAND-OFF  [STAND-OFF]  9.4,29.72 0 top
H5  STAND-OFF  [STAND-OFF]  55.63,9.4 0 top
H6  STAND-OFF  [STAND-OFF]  35.31,9.4 0 top
H7  STAND-OFF  [STAND-OFF]  55.63,29.72 0 top
H8  STAND-OFF  [STAND-OFF]  35.31,29.72 0 top
H9  STAND-OFF  [STAND-OFF]  81.53,9.4 0 top
H10  STAND-OFF  [STAND-OFF]  61.21,9.4 0 top
H11  STAND-OFF  [STAND-OFF]  81.53,29.72 0 top
H12  STAND-OFF  [STAND-OFF]  61.21,29.72 0 top
H13  STAND-OFF  [STAND-OFF]  107.44,9.4 0 top
H14  STAND-OFF  [STAND-OFF]  87.12,9.4 0 top
H15  STAND-OFF  [STAND-OFF]  107.44,29.72 0 top
H16  STAND-OFF  [STAND-OFF]  87.12,29.72 0 top
H17  STAND-OFF  [STAND-OFF]  133.35,9.4 0 top
H18  STAND-OFF  [STAND-OFF]  113.03,9.4 0 top
H19  STAND-OFF  [STAND-OFF]  133.35,29.72 0 top
H20  STAND-OFF  [STAND-OFF]  113.03,29.72 0 top
H21  STAND-OFF  [STAND-OFF]  159.26,9.4 0 top
H22  STAND-OFF  [STAND-OFF]  138.94,9.4 0 top
H23  STAND-OFF  [STAND-OFF]  159.26,29.72 0 top
H24  STAND-OFF  [STAND-OFF]  138.94,29.72 0 top
H25  STAND-OFF  [STAND-OFF]  29.72,35.31 0 top
H26  STAND-OFF  [STAND-OFF]  9.4,35.31 0 top
H27  STAND-OFF  [STAND-OFF]  29.72,55.63 0 top
H28  STAND-OFF  [STAND-OFF]  9.4,55.63 0 top
H29  STAND-OFF  [STAND-OFF]  55.63,35.31 0 top
H30  STAND-OFF  [STAND-OFF]  35.31,35.31 0 top
H31  STAND-OFF  [STAND-OFF]  55.63,55.63 0 top
H32  STAND-OFF  [STAND-OFF]  35.31,55.63 0 top
H33  STAND-OFF  [STAND-OFF]  81.53,35.31 0 top
H34  STAND-OFF  [STAND-OFF]  61.21,35.31 0 top
H35  STAND-OFF  [STAND-OFF]  81.53,55.63 0 top
H36  STAND-OFF  [STAND-OFF]  61.21,55.63 0 top
H37  STAND-OFF  [STAND-OFF]  107.44,35.31 0 top
H38  STAND-OFF  [STAND-OFF]  87.12,35.31 0 top
H39  STAND-OFF  [STAND-OFF]  107.44,55.63 0 top
H40  STAND-OFF  [STAND-OFF]  87.12,55.63 0 top
H41  STAND-OFF  [STAND-OFF]  133.35,35.31 0 top
H42  STAND-OFF  [STAND-OFF]  113.03,35.31 0 top
H43  STAND-OFF  [STAND-OFF]  133.35,55.63 0 top
H44  STAND-OFF  [STAND-OFF]  113.03,55.63 0 top
H45  STAND-OFF  [STAND-OFF]  159.26,35.31 0 top
H46  STAND-OFF  [STAND-OFF]  138.94,35.31 0 top
H47  STAND-OFF  [STAND-OFF]  159.26,55.63 0 top
H48  STAND-OFF  [STAND-OFF]  138.94,55.63 0 top
H49  STAND-OFF  [STAND-OFF]  29.72,61.21 0 top
H50  STAND-OFF  [STAND-OFF]  9.4,61.21 0 top
H51  STAND-OFF  [STAND-OFF]  29.72,81.53 0 top
H52  STAND-OFF  [STAND-OFF]  9.4,81.53 0 top
H53  STAND-OFF  [STAND-OFF]  55.63,61.21 0 top
H54  STAND-OFF  [STAND-OFF]  35.31,61.21 0 top
H55  STAND-OFF  [STAND-OFF]  55.63,81.53 0 top
H56  STAND-OFF  [STAND-OFF]  35.31,81.53 0 top
H57  STAND-OFF  [STAND-OFF]  81.53,61.21 0 top
H58  STAND-OFF  [STAND-OFF]  61.21,61.21 0 top
H59  STAND-OFF  [STAND-OFF]  81.53,81.53 0 top
H60  STAND-OFF  [STAND-OFF]  61.21,81.53 0 top
H61  STAND-OFF  [STAND-OFF]  107.44,61.21 0 top
H62  STAND-OFF  [STAND-OFF]  87.12,61.21 0 top
H63  STAND-OFF  [STAND-OFF]  107.44,81.53 0 top
H64  STAND-OFF  [STAND-OFF]  87.12,81.53 0 top
H65  STAND-OFF  [STAND-OFF]  133.35,61.21 0 top
H66  STAND-OFF  [STAND-OFF]  113.03,61.21 0 top
H67  STAND-OFF  [STAND-OFF]  133.35,81.53 0 top
H68  STAND-OFF  [STAND-OFF]  113.03,81.53 0 top
H69  STAND-OFF  [STAND-OFF]  159.26,61.21 0 top
H70  STAND-OFF  [STAND-OFF]  138.94,61.21 0 top
H71  STAND-OFF  [STAND-OFF]  159.26,81.53 0 top
H72  STAND-OFF  [STAND-OFF]  138.94,81.53 0 top
H73  STAND-OFF  [STAND-OFF]  29.72,87.12 0 top
H74  STAND-OFF  [STAND-OFF]  9.4,87.12 0 top
H75  STAND-OFF  [STAND-OFF]  29.72,107.44 0 top
H76  STAND-OFF  [STAND-OFF]  9.4,107.44 0 top
H77  STAND-OFF  [STAND-OFF]  55.63,87.12 0 top
H78  STAND-OFF  [STAND-OFF]  35.31,87.12 0 top
H79  STAND-OFF  [STAND-OFF]  55.63,107.44 0 top
H80  STAND-OFF  [STAND-OFF]  35.31,107.44 0 top
H81  STAND-OFF  [STAND-OFF]  81.53,87.12 0 top
H82  STAND-OFF  [STAND-OFF]  61.21,87.12 0 top
H83  STAND-OFF  [STAND-OFF]  81.53,107.44 0 top
H84  STAND-OFF  [STAND-OFF]  61.21,107.44 0 top
H85  STAND-OFF  [STAND-OFF]  107.44,87.12 0 top
H86  STAND-OFF  [STAND-OFF]  87.12,87.12 0 top
H87  STAND-OFF  [STAND-OFF]  107.44,107.44 0 top
H88  STAND-OFF  [STAND-OFF]  87.12,107.44 0 top
H89  STAND-OFF  [STAND-OFF]  133.35,87.12 0 top
H90  STAND-OFF  [STAND-OFF]  113.03,87.12 0 top
H91  STAND-OFF  [STAND-OFF]  133.35,107.44 0 top
H92  STAND-OFF  [STAND-OFF]  113.03,107.44 0 top
H93  STAND-OFF  [STAND-OFF]  159.26,87.12 0 top
H94  STAND-OFF  [STAND-OFF]  138.94,87.12 0 top
H95  STAND-OFF  [STAND-OFF]  159.26,107.44 0 top
H96  STAND-OFF  [STAND-OFF]  138.94,107.44 0 top
I2C  JUMPER-SMT_3_2-NC_TRACE_SILK  [SMT-JUMPER_3_2-NC_TRACE_SILK]  21.46,9.4 0 bottom
I2C1  JUMPER-SMT_3_2-NC_TRACE_SILK  [SMT-JUMPER_3_2-NC_TRACE_SILK]  47.37,9.4 0 bottom
I2C2  JUMPER-SMT_3_2-NC_TRACE_SILK  [SMT-JUMPER_3_2-NC_TRACE_SILK]  73.28,9.4 0 bottom
I2C3  JUMPER-SMT_3_2-NC_TRACE_SILK  [SMT-JUMPER_3_2-NC_TRACE_SILK]  99.19,9.4 0 bottom
I2C4  JUMPER-SMT_3_2-NC_TRACE_SILK  [SMT-JUMPER_3_2-NC_TRACE_SILK]  125.09,9.4 0 bottom
I2C5  JUMPER-SMT_3_2-NC_TRACE_SILK  [SMT-JUMPER_3_2-NC_TRACE_SILK]  151,9.4 0 bottom
I2C6  JUMPER-SMT_3_2-NC_TRACE_SILK  [SMT-JUMPER_3_2-NC_TRACE_SILK]  21.46,35.31 0 bottom
I2C7  JUMPER-SMT_3_2-NC_TRACE_SILK  [SMT-JUMPER_3_2-NC_TRACE_SILK]  47.37,35.31 0 bottom
I2C8  JUMPER-SMT_3_2-NC_TRACE_SILK  [SMT-JUMPER_3_2-NC_TRACE_SILK]  73.28,35.31 0 bottom
I2C9  JUMPER-SMT_3_2-NC_TRACE_SILK  [SMT-JUMPER_3_2-NC_TRACE_SILK]  99.19,35.31 0 bottom
I2C10  JUMPER-SMT_3_2-NC_TRACE_SILK  [SMT-JUMPER_3_2-NC_TRACE_SILK]  125.09,35.31 0 bottom
I2C11  JUMPER-SMT_3_2-NC_TRACE_SILK  [SMT-JUMPER_3_2-NC_TRACE_SILK]  151,35.31 0 bottom
I2C12  JUMPER-SMT_3_2-NC_TRACE_SILK  [SMT-JUMPER_3_2-NC_TRACE_SILK]  21.46,61.21 0 bottom
I2C13  JUMPER-SMT_3_2-NC_TRACE_SILK  [SMT-JUMPER_3_2-NC_TRACE_SILK]  47.37,61.21 0 bottom
I2C14  JUMPER-SMT_3_2-NC_TRACE_SILK  [SMT-JUMPER_3_2-NC_TRACE_SILK]  73.28,61.21 0 bottom
I2C15  JUMPER-SMT_3_2-NC_TRACE_SILK  [SMT-JUMPER_3_2-NC_TRACE_SILK]  99.19,61.21 0 bottom
I2C16  JUMPER-SMT_3_2-NC_TRACE_SILK  [SMT-JUMPER_3_2-NC_TRACE_SILK]  125.09,61.21 0 bottom
I2C17  JUMPER-SMT_3_2-NC_TRACE_SILK  [SMT-JUMPER_3_2-NC_TRACE_SILK]  151,61.21 0 bottom
I2C18  JUMPER-SMT_3_2-NC_TRACE_SILK  [SMT-JUMPER_3_2-NC_TRACE_SILK]  21.46,87.12 0 bottom
I2C19  JUMPER-SMT_3_2-NC_TRACE_SILK  [SMT-JUMPER_3_2-NC_TRACE_SILK]  47.37,87.12 0 bottom
I2C20  JUMPER-SMT_3_2-NC_TRACE_SILK  [SMT-JUMPER_3_2-NC_TRACE_SILK]  73.28,87.12 0 bottom
I2C21  JUMPER-SMT_3_2-NC_TRACE_SILK  [SMT-JUMPER_3_2-NC_TRACE_SILK]  99.19,87.12 0 bottom
I2C22  JUMPER-SMT_3_2-NC_TRACE_SILK  [SMT-JUMPER_3_2-NC_TRACE_SILK]  125.09,87.12 0 bottom
I2C23  JUMPER-SMT_3_2-NC_TRACE_SILK  [SMT-JUMPER_3_2-NC_TRACE_SILK]  151,87.12 0 bottom
IN  QWIIC_RIGHT_ANGLE  [JST04_1MM_RA]  19.56,27.18 180 top
IN1  QWIIC_RIGHT_ANGLE  [JST04_1MM_RA]  45.47,27.18 180 top
IN2  QWIIC_RIGHT_ANGLE  [JST04_1MM_RA]  71.37,27.18 180 top
IN3  QWIIC_RIGHT_ANGLE  [JST04_1MM_RA]  97.28,27.18 180 top
IN4  QWIIC_RIGHT_ANGLE  [JST04_1MM_RA]  123.19,27.18 180 top
IN5  QWIIC_RIGHT_ANGLE  [JST04_1MM_RA]  149.1,27.18 180 top
IN6  QWIIC_RIGHT_ANGLE  [JST04_1MM_RA]  19.56,53.09 180 top
IN7  QWIIC_RIGHT_ANGLE  [JST04_1MM_RA]  45.47,53.09 180 top
IN8  QWIIC_RIGHT_ANGLE  [JST04_1MM_RA]  71.37,53.09 180 top
IN9  QWIIC_RIGHT_ANGLE  [JST04_1MM_RA]  97.28,53.09 180 top
IN10  QWIIC_RIGHT_ANGLE  [JST04_1MM_RA]  123.19,53.09 180 top
IN11  QWIIC_RIGHT_ANGLE  [JST04_1MM_RA]  149.1,53.09 180 top
IN12  QWIIC_RIGHT_ANGLE  [JST04_1MM_RA]  19.56,78.99 180 top
IN13  QWIIC_RIGHT_ANGLE  [JST04_1MM_RA]  45.47,78.99 180 top
IN14  QWIIC_RIGHT_ANGLE  [JST04_1MM_RA]  71.37,78.99 180 top
IN15  QWIIC_RIGHT_ANGLE  [JST04_1MM_RA]  97.28,78.99 180 top
IN16  QWIIC_RIGHT_ANGLE  [JST04_1MM_RA]  123.19,78.99 180 top
IN17  QWIIC_RIGHT_ANGLE  [JST04_1MM_RA]  149.1,78.99 180 top
IN18  QWIIC_RIGHT_ANGLE  [JST04_1MM_RA]  19.56,104.9 180 top
IN19  QWIIC_RIGHT_ANGLE  [JST04_1MM_RA]  45.47,104.9 180 top
IN20  QWIIC_RIGHT_ANGLE  [JST04_1MM_RA]  71.37,104.9 180 top
IN21  QWIIC_RIGHT_ANGLE  [JST04_1MM_RA]  97.28,104.9 180 top
IN22  QWIIC_RIGHT_ANGLE  [JST04_1MM_RA]  123.19,104.9 180 top
IN23  QWIIC_RIGHT_ANGLE  [JST04_1MM_RA]  149.1,104.9 180 top
J1  [1X04_NO_SILK]  14.48,8.13 90 top
J2  [1X02_NO_SILK]  40.39,30.99 270 top
J3  [1X04_NO_SILK]  40.39,8.13 90 top
J4  [1X02_NO_SILK]  66.29,30.99 270 top
J5  [1X04_NO_SILK]  66.29,8.13 90 top
J6  [1X02_NO_SILK]  92.2,30.99 270 top
J7  [1X02_NO_SILK]  14.48,30.99 270 top
J8  [1X04_NO_SILK]  92.2,8.13 90 top
J9  [1X02_NO_SILK]  118.11,30.99 270 top
J10  [1X04_NO_SILK]  118.11,8.13 90 top
J11  [1X02_NO_SILK]  144.02,30.99 270 top
J12  [1X04_NO_SILK]  144.02,8.13 90 top
J13  [1X02_NO_SILK]  14.48,56.9 270 top
J14  [1X04_NO_SILK]  14.48,34.04 90 top
J15  [1X02_NO_SILK]  40.39,56.9 270 top
J16  [1X04_NO_SILK]  40.39,34.04 90 top
J17  [1X02_NO_SILK]  66.29,56.9 270 top
J18  [1X04_NO_SILK]  66.29,34.04 90 top
J19  [1X02_NO_SILK]  92.2,56.9 270 top
J20  [1X04_NO_SILK]  92.2,34.04 90 top
J21  [1X02_NO_SILK]  118.11,56.9 270 top
J22  [1X04_NO_SILK]  118.11,34.04 90 top
J23  [1X02_NO_SILK]  144.02,56.9 270 top
J24  [1X04_NO_SILK]  144.02,34.04 90 top
J25  [1X02_NO_SILK]  14.48,82.8 270 top
J26  [1X04_NO_SILK]  14.48,59.94 90 top
J27  [1X02_NO_SILK]  40.39,82.8 270 top
J28  [1X04_NO_SILK]  40.39,59.94 90 top
J29  [1X02_NO_SILK]  66.29,82.8 270 top
J30  [1X04_NO_SILK]  66.29,59.94 90 top
J31  [1X02_NO_SILK]  92.2,82.8 270 top
J32  [1X04_NO_SILK]  92.2,59.94 90 top
J33  [1X02_NO_SILK]  118.11,82.8 270 top
J34  [1X04_NO_SILK]  118.11,59.94 90 top
J35  [1X02_NO_SILK]  144.02,82.8 270 top
J36  [1X04_NO_SILK]  144.02,59.94 90 top
J37  [1X02_NO_SILK]  14.48,108.71 270 top
J38  [1X04_NO_SILK]  14.48,85.85 90 top
J39  [1X02_NO_SILK]  40.39,108.71 270 top
J40  [1X04_NO_SILK]  40.39,85.85 90 top
J41  [1X02_NO_SILK]  66.29,108.71 270 top
J42  [1X04_NO_SILK]  66.29,85.85 90 top
J43  [1X02_NO_SILK]  92.2,108.71 270 top
J44  [1X04_NO_SILK]  92.2,85.85 90 top
J45  [1X02_NO_SILK]  118.11,108.71 270 top
J46  [1X04_NO_SILK]  118.11,85.85 90 top
J47  [1X02_NO_SILK]  144.02,108.71 270 top
J48  [1X04_NO_SILK]  144.02,85.85 90 top
JP0  JUMPER-SMT_3_2-NC_TRACE_SILK  [SMT-JUMPER_3_2-NC_TRACE_SILK]  9.4,23.37 90 bottom
JP1  JUMPER-SMT_3_2-NC_TRACE_SILK  [SMT-JUMPER_3_2-NC_TRACE_SILK]  9.4,15.75 90 bottom
JP2  JUMPER-SMT_3_2-NC_TRACE_SILK  [SMT-JUMPER_3_2-NC_TRACE_SILK]  29.72,15.75 90 bottom
JP3  JUMPER-SMT_3_2-NC_TRACE_SILK  [SMT-JUMPER_3_2-NC_TRACE_SILK]  29.72,23.37 270 bottom
JP4  JUMPER-SMT_3_2-NC_TRACE_SILK  [SMT-JUMPER_3_2-NC_TRACE_SILK]  35.31,23.37 90 bottom
JP5  JUMPER-SMT_3_2-NC_TRACE_SILK  [SMT-JUMPER_3_2-NC_TRACE_SILK]  35.31,15.75 90 bottom
JP6  JUMPER-SMT_3_2-NC_TRACE_SILK  [SMT-JUMPER_3_2-NC_TRACE_SILK]  55.63,15.75 90 bottom
JP7  JUMPER-SMT_3_2-NC_TRACE_SILK  [SMT-JUMPER_3_2-NC_TRACE_SILK]  55.63,23.37 270 bottom
JP8  JUMPER-SMT_3_2-NC_TRACE_SILK  [SMT-JUMPER_3_2-NC_TRACE_SILK]  61.21,23.37 90 bottom
JP9  JUMPER-SMT_3_2-NC_TRACE_SILK  [SMT-JUMPER_3_2-NC_TRACE_SILK]  61.21,15.75 90 bottom
JP10  JUMPER-SMT_3_2-NC_TRACE_SILK  [SMT-JUMPER_3_2-NC_TRACE_SILK]  81.53,15.75 90 bottom
JP11  JUMPER-SMT_3_2-NC_TRACE_SILK  [SMT-JUMPER_3_2-NC_TRACE_SILK]  81.53,23.37 270 bottom
JP12  JUMPER-SMT_3_2-NC_TRACE_SILK  [SMT-JUMPER_3_2-NC_TRACE_SILK]  87.12,23.37 90 bottom
JP13  JUMPER-SMT_3_2-NC_TRACE_SILK  [SMT-JUMPER_3_2-NC_TRACE_SILK]  87.12,15.75 90 bottom
JP14  JUMPER-SMT_3_2-NC_TRACE_SILK  [SMT-JUMPER_3_2-NC_TRACE_SILK]  107.44,15.75 90 bottom
JP15  JUMPER-SMT_3_2-NC_TRACE_SILK  [SMT-JUMPER_3_2-NC_TRACE_SILK]  107.44,23.37 270 bottom
JP16  JUMPER-SMT_3_2-NC_TRACE_SILK  [SMT-JUMPER_3_2-NC_TRACE_SILK]  113.03,23.37 90 bottom
JP17  JUMPER-SMT_3_2-NC_TRACE_SILK  [SMT-JUMPER_3_2-NC_TRACE_SILK]  113.03,15.75 90 bottom
JP18  JUMPER-SMT_3_2-NC_TRACE_SILK  [SMT-JUMPER_3_2-NC_TRACE_SILK]  133.35,15.75 90 bottom
JP19  JUMPER-SMT_3_2-NC_TRACE_SILK  [SMT-JUMPER_3_2-NC_TRACE_SILK]  133.35,23.37 270 bottom
JP20  JUMPER-SMT_3_2-NC_TRACE_SILK  [SMT-JUMPER_3_2-NC_TRACE_SILK]  138.94,23.37 90 bottom
JP21  JUMPER-SMT_3_2-NC_TRACE_SILK  [SMT-JUMPER_3_2-NC_TRACE_SILK]  138.94,15.75 90 bottom
JP22  JUMPER-SMT_3_2-NC_TRACE_SILK  [SMT-JUMPER_3_2-NC_TRACE_SILK]  159.26,15.75 90 bottom
JP23  JUMPER-SMT_3_2-NC_TRACE_SILK  [SMT-JUMPER_3_2-NC_TRACE_SILK]  159.26,23.37 270 bottom
JP24  JUMPER-SMT_3_2-NC_TRACE_SILK  [SMT-JUMPER_3_2-NC_TRACE_SILK]  9.4,49.28 90 bottom
JP25  JUMPER-SMT_3_2-NC_TRACE_SILK  [SMT-JUMPER_3_2-NC_TRACE_SILK]  9.4,41.66 90 bottom
JP26  JUMPER-SMT_3_2-NC_TRACE_SILK  [SMT-JUMPER_3_2-NC_TRACE_SILK]  29.72,41.66 90 bottom
JP27  JUMPER-SMT_3_2-NC_TRACE_SILK  [SMT-JUMPER_3_2-NC_TRACE_SILK]  29.72,49.28 270 bottom
JP28  JUMPER-SMT_3_2-NC_TRACE_SILK  [SMT-JUMPER_3_2-NC_TRACE_SILK]  35.31,49.28 90 bottom
JP29  JUMPER-SMT_3_2-NC_TRACE_SILK  [SMT-JUMPER_3_2-NC_TRACE_SILK]  35.31,41.66 90 bottom
JP30  JUMPER-SMT_3_2-NC_TRACE_SILK  [SMT-JUMPER_3_2-NC_TRACE_SILK]  55.63,41.66 90 bottom
JP31  JUMPER-SMT_3_2-NC_TRACE_SILK  [SMT-JUMPER_3_2-NC_TRACE_SILK]  55.63,49.28 270 bottom
JP32  JUMPER-SMT_3_2-NC_TRACE_SILK  [SMT-JUMPER_3_2-NC_TRACE_SILK]  61.21,49.28 90 bottom
JP33  JUMPER-SMT_3_2-NC_TRACE_SILK  [SMT-JUMPER_3_2-NC_TRACE_SILK]  61.21,41.66 90 bottom
JP34  JUMPER-SMT_3_2-NC_TRACE_SILK  [SMT-JUMPER_3_2-NC_TRACE_SILK]  81.53,41.66 90 bottom
JP35  JUMPER-SMT_3_2-NC_TRACE_SILK  [SMT-JUMPER_3_2-NC_TRACE_SILK]  81.53,49.28 270 bottom
JP36  JUMPER-SMT_3_2-NC_TRACE_SILK  [SMT-JUMPER_3_2-NC_TRACE_SILK]  87.12,49.28 90 bottom
JP37  JUMPER-SMT_3_2-NC_TRACE_SILK  [SMT-JUMPER_3_2-NC_TRACE_SILK]  87.12,41.66 90 bottom
JP38  JUMPER-SMT_3_2-NC_TRACE_SILK  [SMT-JUMPER_3_2-NC_TRACE_SILK]  107.44,41.66 90 bottom
JP39  JUMPER-SMT_3_2-NC_TRACE_SILK  [SMT-JUMPER_3_2-NC_TRACE_SILK]  107.44,49.28 270 bottom
JP40  JUMPER-SMT_3_2-NC_TRACE_SILK  [SMT-JUMPER_3_2-NC_TRACE_SILK]  113.03,49.28 90 bottom
JP41  JUMPER-SMT_3_2-NC_TRACE_SILK  [SMT-JUMPER_3_2-NC_TRACE_SILK]  113.03,41.66 90 bottom
JP42  JUMPER-SMT_3_2-NC_TRACE_SILK  [SMT-JUMPER_3_2-NC_TRACE_SILK]  133.35,41.66 90 bottom
JP43  JUMPER-SMT_3_2-NC_TRACE_SILK  [SMT-JUMPER_3_2-NC_TRACE_SILK]  133.35,49.28 270 bottom
JP44  JUMPER-SMT_3_2-NC_TRACE_SILK  [SMT-JUMPER_3_2-NC_TRACE_SILK]  138.94,49.28 90 bottom
JP45  JUMPER-SMT_3_2-NC_TRACE_SILK  [SMT-JUMPER_3_2-NC_TRACE_SILK]  138.94,41.66 90 bottom
JP46  JUMPER-SMT_3_2-NC_TRACE_SILK  [SMT-JUMPER_3_2-NC_TRACE_SILK]  159.26,41.66 90 bottom
JP47  JUMPER-SMT_3_2-NC_TRACE_SILK  [SMT-JUMPER_3_2-NC_TRACE_SILK]  159.26,49.28 270 bottom
JP48  JUMPER-SMT_3_2-NC_TRACE_SILK  [SMT-JUMPER_3_2-NC_TRACE_SILK]  9.4,75.18 90 bottom
JP49  JUMPER-SMT_3_2-NC_TRACE_SILK  [SMT-JUMPER_3_2-NC_TRACE_SILK]  9.4,67.56 90 bottom
JP50  JUMPER-SMT_3_2-NC_TRACE_SILK  [SMT-JUMPER_3_2-NC_TRACE_SILK]  29.72,67.56 90 bottom
JP51  JUMPER-SMT_3_2-NC_TRACE_SILK  [SMT-JUMPER_3_2-NC_TRACE_SILK]  29.72,75.18 270 bottom
JP52  JUMPER-SMT_3_2-NC_TRACE_SILK  [SMT-JUMPER_3_2-NC_TRACE_SILK]  35.31,75.18 90 bottom
JP53  JUMPER-SMT_3_2-NC_TRACE_SILK  [SMT-JUMPER_3_2-NC_TRACE_SILK]  35.31,67.56 90 bottom
JP54  JUMPER-SMT_3_2-NC_TRACE_SILK  [SMT-JUMPER_3_2-NC_TRACE_SILK]  55.63,67.56 90 bottom
JP55  JUMPER-SMT_3_2-NC_TRACE_SILK  [SMT-JUMPER_3_2-NC_TRACE_SILK]  55.63,75.18 270 bottom
JP56  JUMPER-SMT_3_2-NC_TRACE_SILK  [SMT-JUMPER_3_2-NC_TRACE_SILK]  61.21,75.18 90 bottom
JP57  JUMPER-SMT_3_2-NC_TRACE_SILK  [SMT-JUMPER_3_2-NC_TRACE_SILK]  61.21,67.56 90 bottom
JP58  JUMPER-SMT_3_2-NC_TRACE_SILK  [SMT-JUMPER_3_2-NC_TRACE_SILK]  81.53,67.56 90 bottom
JP59  JUMPER-SMT_3_2-NC_TRACE_SILK  [SMT-JUMPER_3_2-NC_TRACE_SILK]  81.53,75.18 270 bottom
JP60  JUMPER-SMT_3_2-NC_TRACE_SILK  [SMT-JUMPER_3_2-NC_TRACE_SILK]  87.12,75.18 90 bottom
JP61  JUMPER-SMT_3_2-NC_TRACE_SILK  [SMT-JUMPER_3_2-NC_TRACE_SILK]  87.12,67.56 90 bottom
JP62  JUMPER-SMT_3_2-NC_TRACE_SILK  [SMT-JUMPER_3_2-NC_TRACE_SILK]  107.44,67.56 90 bottom
JP63  JUMPER-SMT_3_2-NC_TRACE_SILK  [SMT-JUMPER_3_2-NC_TRACE_SILK]  107.44,75.18 270 bottom
JP64  JUMPER-SMT_3_2-NC_TRACE_SILK  [SMT-JUMPER_3_2-NC_TRACE_SILK]  113.03,75.18 90 bottom
JP65  JUMPER-SMT_3_2-NC_TRACE_SILK  [SMT-JUMPER_3_2-NC_TRACE_SILK]  113.03,67.56 90 bottom
JP66  JUMPER-SMT_3_2-NC_TRACE_SILK  [SMT-JUMPER_3_2-NC_TRACE_SILK]  133.35,67.56 90 bottom
JP67  JUMPER-SMT_3_2-NC_TRACE_SILK  [SMT-JUMPER_3_2-NC_TRACE_SILK]  133.35,75.18 270 bottom
JP68  JUMPER-SMT_3_2-NC_TRACE_SILK  [SMT-JUMPER_3_2-NC_TRACE_SILK]  138.94,75.18 90 bottom
JP69  JUMPER-SMT_3_2-NC_TRACE_SILK  [SMT-JUMPER_3_2-NC_TRACE_SILK]  138.94,67.56 90 bottom
JP70  JUMPER-SMT_3_2-NC_TRACE_SILK  [SMT-JUMPER_3_2-NC_TRACE_SILK]  159.26,67.56 90 bottom
JP71  JUMPER-SMT_3_2-NC_TRACE_SILK  [SMT-JUMPER_3_2-NC_TRACE_SILK]  159.26,75.18 270 bottom
JP72  JUMPER-SMT_3_2-NC_TRACE_SILK  [SMT-JUMPER_3_2-NC_TRACE_SILK]  9.4,101.09 90 bottom
JP73  JUMPER-SMT_3_2-NC_TRACE_SILK  [SMT-JUMPER_3_2-NC_TRACE_SILK]  9.4,93.47 90 bottom
JP74  JUMPER-SMT_3_2-NC_TRACE_SILK  [SMT-JUMPER_3_2-NC_TRACE_SILK]  29.72,93.47 90 bottom
JP75  JUMPER-SMT_3_2-NC_TRACE_SILK  [SMT-JUMPER_3_2-NC_TRACE_SILK]  29.72,101.09 270 bottom
JP76  JUMPER-SMT_3_2-NC_TRACE_SILK  [SMT-JUMPER_3_2-NC_TRACE_SILK]  35.31,101.09 90 bottom
JP77  JUMPER-SMT_3_2-NC_TRACE_SILK  [SMT-JUMPER_3_2-NC_TRACE_SILK]  35.31,93.47 90 bottom
JP78  JUMPER-SMT_3_2-NC_TRACE_SILK  [SMT-JUMPER_3_2-NC_TRACE_SILK]  55.63,93.47 90 bottom
JP79  JUMPER-SMT_3_2-NC_TRACE_SILK  [SMT-JUMPER_3_2-NC_TRACE_SILK]  55.63,101.09 270 bottom
JP80  JUMPER-SMT_3_2-NC_TRACE_SILK  [SMT-JUMPER_3_2-NC_TRACE_SILK]  61.21,101.09 90 bottom
JP81  JUMPER-SMT_3_2-NC_TRACE_SILK  [SMT-JUMPER_3_2-NC_TRACE_SILK]  61.21,93.47 90 bottom
JP82  JUMPER-SMT_3_2-NC_TRACE_SILK  [SMT-JUMPER_3_2-NC_TRACE_SILK]  81.53,93.47 90 bottom
JP83  JUMPER-SMT_3_2-NC_TRACE_SILK  [SMT-JUMPER_3_2-NC_TRACE_SILK]  81.53,101.09 270 bottom
JP84  JUMPER-SMT_3_2-NC_TRACE_SILK  [SMT-JUMPER_3_2-NC_TRACE_SILK]  87.12,101.09 90 bottom
JP85  JUMPER-SMT_3_2-NC_TRACE_SILK  [SMT-JUMPER_3_2-NC_TRACE_SILK]  87.12,93.47 90 bottom
JP86  JUMPER-SMT_3_2-NC_TRACE_SILK  [SMT-JUMPER_3_2-NC_TRACE_SILK]  107.44,93.47 90 bottom
JP87  JUMPER-SMT_3_2-NC_TRACE_SILK  [SMT-JUMPER_3_2-NC_TRACE_SILK]  107.44,101.09 270 bottom
JP88  JUMPER-SMT_3_2-NC_TRACE_SILK  [SMT-JUMPER_3_2-NC_TRACE_SILK]  113.03,101.09 90 bottom
JP89  JUMPER-SMT_3_2-NC_TRACE_SILK  [SMT-JUMPER_3_2-NC_TRACE_SILK]  113.03,93.47 90 bottom
JP90  JUMPER-SMT_3_2-NC_TRACE_SILK  [SMT-JUMPER_3_2-NC_TRACE_SILK]  133.35,93.47 90 bottom
JP91  JUMPER-SMT_3_2-NC_TRACE_SILK  [SMT-JUMPER_3_2-NC_TRACE_SILK]  133.35,101.09 270 bottom
JP92  JUMPER-SMT_3_2-NC_TRACE_SILK  [SMT-JUMPER_3_2-NC_TRACE_SILK]  138.94,101.09 90 bottom
JP93  JUMPER-SMT_3_2-NC_TRACE_SILK  [SMT-JUMPER_3_2-NC_TRACE_SILK]  138.94,93.47 90 bottom
JP94  JUMPER-SMT_3_2-NC_TRACE_SILK  [SMT-JUMPER_3_2-NC_TRACE_SILK]  159.26,93.47 90 bottom
JP95  JUMPER-SMT_3_2-NC_TRACE_SILK  [SMT-JUMPER_3_2-NC_TRACE_SILK]  159.26,101.09 270 bottom
LED  JUMPER-SMT_2_NC_TRACE_SILK  [SMT-JUMPER_2_NC_TRACE_SILK]  24.64,29.72 270 bottom
LED1  JUMPER-SMT_2_NC_TRACE_SILK  [SMT-JUMPER_2_NC_TRACE_SILK]  50.55,29.72 270 bottom
LED2  JUMPER-SMT_2_NC_TRACE_SILK  [SMT-JUMPER_2_NC_TRACE_SILK]  76.45,29.72 270 bottom
LED3  JUMPER-SMT_2_NC_TRACE_SILK  [SMT-JUMPER_2_NC_TRACE_SILK]  102.36,29.72 270 bottom
LED4  JUMPER-SMT_2_NC_TRACE_SILK  [SMT-JUMPER_2_NC_TRACE_SILK]  128.27,29.72 270 bottom
LED5  JUMPER-SMT_2_NC_TRACE_SILK  [SMT-JUMPER_2_NC_TRACE_SILK]  154.18,29.72 270 bottom
LED6  JUMPER-SMT_2_NC_TRACE_SILK  [SMT-JUMPER_2_NC_TRACE_SILK]  24.64,55.63 270 bottom
LED7  JUMPER-SMT_2_NC_TRACE_SILK  [SMT-JUMPER_2_NC_TRACE_SILK]  50.55,55.63 270 bottom
LED8  JUMPER-SMT_2_NC_TRACE_SILK  [SMT-JUMPER_2_NC_TRACE_SILK]  76.45,55.63 270 bottom
LED9  JUMPER-SMT_2_NC_TRACE_SILK  [SMT-JUMPER_2_NC_TRACE_SILK]  102.36,55.63 270 bottom
LED10  JUMPER-SMT_2_NC_TRACE_SILK  [SMT-JUMPER_2_NC_TRACE_SILK]  128.27,55.63 270 bottom
LED11  JUMPER-SMT_2_NC_TRACE_SILK  [SMT-JUMPER_2_NC_TRACE_SILK]  154.18,55.63 270 bottom
LED12  JUMPER-SMT_2_NC_TRACE_SILK  [SMT-JUMPER_2_NC_TRACE_SILK]  24.64,81.53 270 bottom
LED13  JUMPER-SMT_2_NC_TRACE_SILK  [SMT-JUMPER_2_NC_TRACE_SILK]  50.55,81.53 270 bottom
LED14  JUMPER-SMT_2_NC_TRACE_SILK  [SMT-JUMPER_2_NC_TRACE_SILK]  76.45,81.53 270 bottom
LED15  JUMPER-SMT_2_NC_TRACE_SILK  [SMT-JUMPER_2_NC_TRACE_SILK]  102.36,81.53 270 bottom
LED16  JUMPER-SMT_2_NC_TRACE_SILK  [SMT-JUMPER_2_NC_TRACE_SILK]  128.27,81.53 270 bottom
LED17  JUMPER-SMT_2_NC_TRACE_SILK  [SMT-JUMPER_2_NC_TRACE_SILK]  154.18,81.53 270 bottom
LED18  JUMPER-SMT_2_NC_TRACE_SILK  [SMT-JUMPER_2_NC_TRACE_SILK]  24.64,107.44 270 bottom
LED19  JUMPER-SMT_2_NC_TRACE_SILK  [SMT-JUMPER_2_NC_TRACE_SILK]  50.55,107.44 270 bottom
LED20  JUMPER-SMT_2_NC_TRACE_SILK  [SMT-JUMPER_2_NC_TRACE_SILK]  76.45,107.44 270 bottom
LED21  JUMPER-SMT_2_NC_TRACE_SILK  [SMT-JUMPER_2_NC_TRACE_SILK]  102.36,107.44 270 bottom
LED22  JUMPER-SMT_2_NC_TRACE_SILK  [SMT-JUMPER_2_NC_TRACE_SILK]  128.27,107.44 270 bottom
LED23  JUMPER-SMT_2_NC_TRACE_SILK  [SMT-JUMPER_2_NC_TRACE_SILK]  154.18,107.44 270 bottom
LOGO1  OSHW-LOGOMINI  [OSHW-LOGO-MINI]  50.55,9.4 0 top
LOGO2  OSHW-LOGOMINI  [OSHW-LOGO-MINI]  76.45,9.4 0 top
LOGO3  OSHW-LOGOMINI  [OSHW-LOGO-MINI]  102.36,9.4 0 top
LOGO4  OSHW-LOGOMINI  [OSHW-LOGO-MINI]  24.64,9.4 0 top
LOGO5  OSHW-LOGOMINI  [OSHW-LOGO-MINI]  128.27,9.4 0 top
LOGO6  OSHW-LOGOMINI  [OSHW-LOGO-MINI]  154.18,9.4 0 top
LOGO7  OSHW-LOGOMINI  [OSHW-LOGO-MINI]  24.64,35.31 0 top
LOGO8  OSHW-LOGOMINI  [OSHW-LOGO-MINI]  50.55,35.31 0 top
LOGO9  OSHW-LOGOMINI  [OSHW-LOGO-MINI]  76.45,35.31 0 top
LOGO10  OSHW-LOGOMINI  [OSHW-LOGO-MINI]  102.36,35.31 0 top
LOGO11  OSHW-LOGOMINI  [OSHW-LOGO-MINI]  128.27,35.31 0 top
LOGO12  OSHW-LOGOMINI  [OSHW-LOGO-MINI]  154.18,35.31 0 top
LOGO13  OSHW-LOGOMINI  [OSHW-LOGO-MINI]  24.64,61.21 0 top
LOGO14  OSHW-LOGOMINI  [OSHW-LOGO-MINI]  50.55,61.21 0 top
LOGO15  OSHW-LOGOMINI  [OSHW-LOGO-MINI]  76.45,61.21 0 top
LOGO16  OSHW-LOGOMINI  [OSHW-LOGO-MINI]  102.36,61.21 0 top
LOGO17  OSHW-LOGOMINI  [OSHW-LOGO-MINI]  128.27,61.21 0 top
LOGO18  OSHW-LOGOMINI  [OSHW-LOGO-MINI]  154.18,61.21 0 top
LOGO19  OSHW-LOGOMINI  [OSHW-LOGO-MINI]  24.64,87.12 0 top
LOGO20  OSHW-LOGOMINI  [OSHW-LOGO-MINI]  50.55,87.12 0 top
LOGO21  OSHW-LOGOMINI  [OSHW-LOGO-MINI]  76.45,87.12 0 top
LOGO22  OSHW-LOGOMINI  [OSHW-LOGO-MINI]  102.36,87.12 0 top
LOGO23  OSHW-LOGOMINI  [OSHW-LOGO-MINI]  128.27,87.12 0 top
LOGO24  OSHW-LOGOMINI  [OSHW-LOGO-MINI]  154.18,87.12 0 top
OUT  QWIIC_RIGHT_ANGLE  [JST04_1MM_RA]  19.56,11.94 0 top
OUT1  QWIIC_RIGHT_ANGLE  [JST04_1MM_RA]  45.47,11.94 0 top
OUT2  QWIIC_RIGHT_ANGLE  [JST04_1MM_RA]  71.37,11.94 0 top
OUT3  QWIIC_RIGHT_ANGLE  [JST04_1MM_RA]  97.28,11.94 0 top
OUT4  QWIIC_RIGHT_ANGLE  [JST04_1MM_RA]  123.19,11.94 0 top
OUT5  QWIIC_RIGHT_ANGLE  [JST04_1MM_RA]  149.1,11.94 0 top
OUT6  QWIIC_RIGHT_ANGLE  [JST04_1MM_RA]  19.56,37.85 0 top
OUT7  QWIIC_RIGHT_ANGLE  [JST04_1MM_RA]  45.47,37.85 0 top
OUT8  QWIIC_RIGHT_ANGLE  [JST04_1MM_RA]  71.37,37.85 0 top
OUT9  QWIIC_RIGHT_ANGLE  [JST04_1MM_RA]  97.28,37.85 0 top
OUT10  QWIIC_RIGHT_ANGLE  [JST04_1MM_RA]  123.19,37.85 0 top
OUT11  QWIIC_RIGHT_ANGLE  [JST04_1MM_RA]  149.1,37.85 0 top
OUT12  QWIIC_RIGHT_ANGLE  [JST04_1MM_RA]  19.56,63.75 0 top
OUT13  QWIIC_RIGHT_ANGLE  [JST04_1MM_RA]  45.47,63.75 0 top
OUT14  QWIIC_RIGHT_ANGLE  [JST04_1MM_RA]  71.37,63.75 0 top
OUT15  QWIIC_RIGHT_ANGLE  [JST04_1MM_RA]  97.28,63.75 0 top
OUT16  QWIIC_RIGHT_ANGLE  [JST04_1MM_RA]  123.19,63.75 0 top
OUT17  QWIIC_RIGHT_ANGLE  [JST04_1MM_RA]  149.1,63.75 0 top
OUT18  QWIIC_RIGHT_ANGLE  [JST04_1MM_RA]  19.56,89.66 0 top
OUT19  QWIIC_RIGHT_ANGLE  [JST04_1MM_RA]  45.47,89.66 0 top
OUT20  QWIIC_RIGHT_ANGLE  [JST04_1MM_RA]  71.37,89.66 0 top
OUT21  QWIIC_RIGHT_ANGLE  [JST04_1MM_RA]  97.28,89.66 0 top
OUT22  QWIIC_RIGHT_ANGLE  [JST04_1MM_RA]  123.19,89.66 0 top
OUT23  QWIIC_RIGHT_ANGLE  [JST04_1MM_RA]  149.1,89.66 0 top
PORT0  QWIIC_RIGHT_ANGLE  [JST04_1MM_RA]  11.94,23.37 270 top
PORT1  QWIIC_RIGHT_ANGLE  [JST04_1MM_RA]  11.94,15.75 270 top
PORT2  QWIIC_RIGHT_ANGLE  [JST04_1MM_RA]  27.18,15.75 90 top
PORT3  QWIIC_RIGHT_ANGLE  [JST04_1MM_RA]  27.18,23.37 90 top
PORT4  QWIIC_RIGHT_ANGLE  [JST04_1MM_RA]  37.85,23.37 270 top
PORT5  QWIIC_RIGHT_ANGLE  [JST04_1MM_RA]  37.85,15.75 270 top
PORT6  QWIIC_RIGHT_ANGLE  [JST04_1MM_RA]  53.09,15.75 90 top
PORT7  QWIIC_RIGHT_ANGLE  [JST04_1MM_RA]  53.09,23.37 90 top
PORT8  QWIIC_RIGHT_ANGLE  [JST04_1MM_RA]  63.75,23.37 270 top
PORT9  QWIIC_RIGHT_ANGLE  [JST04_1MM_RA]  63.75,15.75 270 top
PORT10  QWIIC_RIGHT_ANGLE  [JST04_1MM_RA]  78.99,15.75 90 top
PORT11  QWIIC_RIGHT_ANGLE  [JST04_1MM_RA]  78.99,23.37 90 top
PORT12  QWIIC_RIGHT_ANGLE  [JST04_1MM_RA]  89.66,23.37 270 top
PORT13  QWIIC_RIGHT_ANGLE  [JST04_1MM_RA]  89.66,15.75 270 top
PORT14  QWIIC_RIGHT_ANGLE  [JST04_1MM_RA]  104.9,15.75 90 top
PORT15  QWIIC_RIGHT_ANGLE  [JST04_1MM_RA]  104.9,23.37 90 top
PORT16  QWIIC_RIGHT_ANGLE  [JST04_1MM_RA]  115.57,23.37 270 top
PORT17  QWIIC_RIGHT_ANGLE  [JST04_1MM_RA]  115.57,15.75 270 top
PORT18  QWIIC_RIGHT_ANGLE  [JST04_1MM_RA]  130.81,15.75 90 top
PORT19  QWIIC_RIGHT_ANGLE  [JST04_1MM_RA]  130.81,23.37 90 top
PORT20  QWIIC_RIGHT_ANGLE  [JST04_1MM_RA]  141.48,23.37 270 top
PORT21  QWIIC_RIGHT_ANGLE  [JST04_1MM_RA]  141.48,15.75 270 top
PORT22  QWIIC_RIGHT_ANGLE  [JST04_1MM_RA]  156.72,15.75 90 top
PORT23  QWIIC_RIGHT_ANGLE  [JST04_1MM_RA]  156.72,23.37 90 top
PORT24  QWIIC_RIGHT_ANGLE  [JST04_1MM_RA]  11.94,49.28 270 top
PORT25  QWIIC_RIGHT_ANGLE  [JST04_1MM_RA]  11.94,41.66 270 top
PORT26  QWIIC_RIGHT_ANGLE  [JST04_1MM_RA]  27.18,41.66 90 top
PORT27  QWIIC_RIGHT_ANGLE  [JST04_1MM_RA]  27.18,49.28 90 top
PORT28  QWIIC_RIGHT_ANGLE  [JST04_1MM_RA]  37.85,49.28 270 top
PORT29  QWIIC_RIGHT_ANGLE  [JST04_1MM_RA]  37.85,41.66 270 top
PORT30  QWIIC_RIGHT_ANGLE  [JST04_1MM_RA]  53.09,41.66 90 top
PORT31  QWIIC_RIGHT_ANGLE  [JST04_1MM_RA]  53.09,49.28 90 top
PORT32  QWIIC_RIGHT_ANGLE  [JST04_1MM_RA]  63.75,49.28 270 top
PORT33  QWIIC_RIGHT_ANGLE  [JST04_1MM_RA]  63.75,41.66 270 top
PORT34  QWIIC_RIGHT_ANGLE  [JST04_1MM_RA]  78.99,41.66 90 top
PORT35  QWIIC_RIGHT_ANGLE  [JST04_1MM_RA]  78.99,49.28 90 top
PORT36  QWIIC_RIGHT_ANGLE  [JST04_1MM_RA]  89.66,49.28 270 top
PORT37  QWIIC_RIGHT_ANGLE  [JST04_1MM_RA]  89.66,41.66 270 top
PORT38  QWIIC_RIGHT_ANGLE  [JST04_1MM_RA]  104.9,41.66 90 top
PORT39  QWIIC_RIGHT_ANGLE  [JST04_1MM_RA]  104.9,49.28 90 top
PORT40  QWIIC_RIGHT_ANGLE  [JST04_1MM_RA]  115.57,49.28 270 top
PORT41  QWIIC_RIGHT_ANGLE  [JST04_1MM_RA]  115.57,41.66 270 top
PORT42  QWIIC_RIGHT_ANGLE  [JST04_1MM_RA]  130.81,41.66 90 top
PORT43  QWIIC_RIGHT_ANGLE  [JST04_1MM_RA]  130.81,49.28 90 top
PORT44  QWIIC_RIGHT_ANGLE  [JST04_1MM_RA]  141.48,49.28 270 top
PORT45  QWIIC_RIGHT_ANGLE  [JST04_1MM_RA]  141.48,41.66 270 top
PORT46  QWIIC_RIGHT_ANGLE  [JST04_1MM_RA]  156.72,41.66 90 top
PORT47  QWIIC_RIGHT_ANGLE  [JST04_1MM_RA]  156.72,49.28 90 top
PORT48  QWIIC_RIGHT_ANGLE  [JST04_1MM_RA]  11.94,75.18 270 top
PORT49  QWIIC_RIGHT_ANGLE  [JST04_1MM_RA]  11.94,67.56 270 top
PORT50  QWIIC_RIGHT_ANGLE  [JST04_1MM_RA]  27.18,67.56 90 top
PORT51  QWIIC_RIGHT_ANGLE  [JST04_1MM_RA]  27.18,75.18 90 top
PORT52  QWIIC_RIGHT_ANGLE  [JST04_1MM_RA]  37.85,75.18 270 top
PORT53  QWIIC_RIGHT_ANGLE  [JST04_1MM_RA]  37.85,67.56 270 top
PORT54  QWIIC_RIGHT_ANGLE  [JST04_1MM_RA]  53.09,67.56 90 top
PORT55  QWIIC_RIGHT_ANGLE  [JST04_1MM_RA]  53.09,75.18 90 top
PORT56  QWIIC_RIGHT_ANGLE  [JST04_1MM_RA]  63.75,75.18 270 top
PORT57  QWIIC_RIGHT_ANGLE  [JST04_1MM_RA]  63.75,67.56 270 top
PORT58  QWIIC_RIGHT_ANGLE  [JST04_1MM_RA]  78.99,67.56 90 top
PORT59  QWIIC_RIGHT_ANGLE  [JST04_1MM_RA]  78.99,75.18 90 top
PORT60  QWIIC_RIGHT_ANGLE  [JST04_1MM_RA]  89.66,75.18 270 top
PORT61  QWIIC_RIGHT_ANGLE  [JST04_1MM_RA]  89.66,67.56 270 top
PORT62  QWIIC_RIGHT_ANGLE  [JST04_1MM_RA]  104.9,67.56 90 top